# Altium PCB Copy of SoM.PcbDoc (part 1 of 8)
Units mm, origin at the board's own origin, x right, y up, seen from the top; angles counter-clockwise.
Board outline 69.6 x 50 mm, 10 copper layers ([1] Signal HS-H, [2] GND, [3] Signal HS-V, [4] Signal H, [5] GND, [6] POWER, [7] Signal V, [8] Signal HS-H, [9] GND, [10] Signal HS-V), stack 1.146 mm thick; 537 components, 516 nets, 5689 pads, 981 vias.
Unrouted connection lines stored in the file: 963.
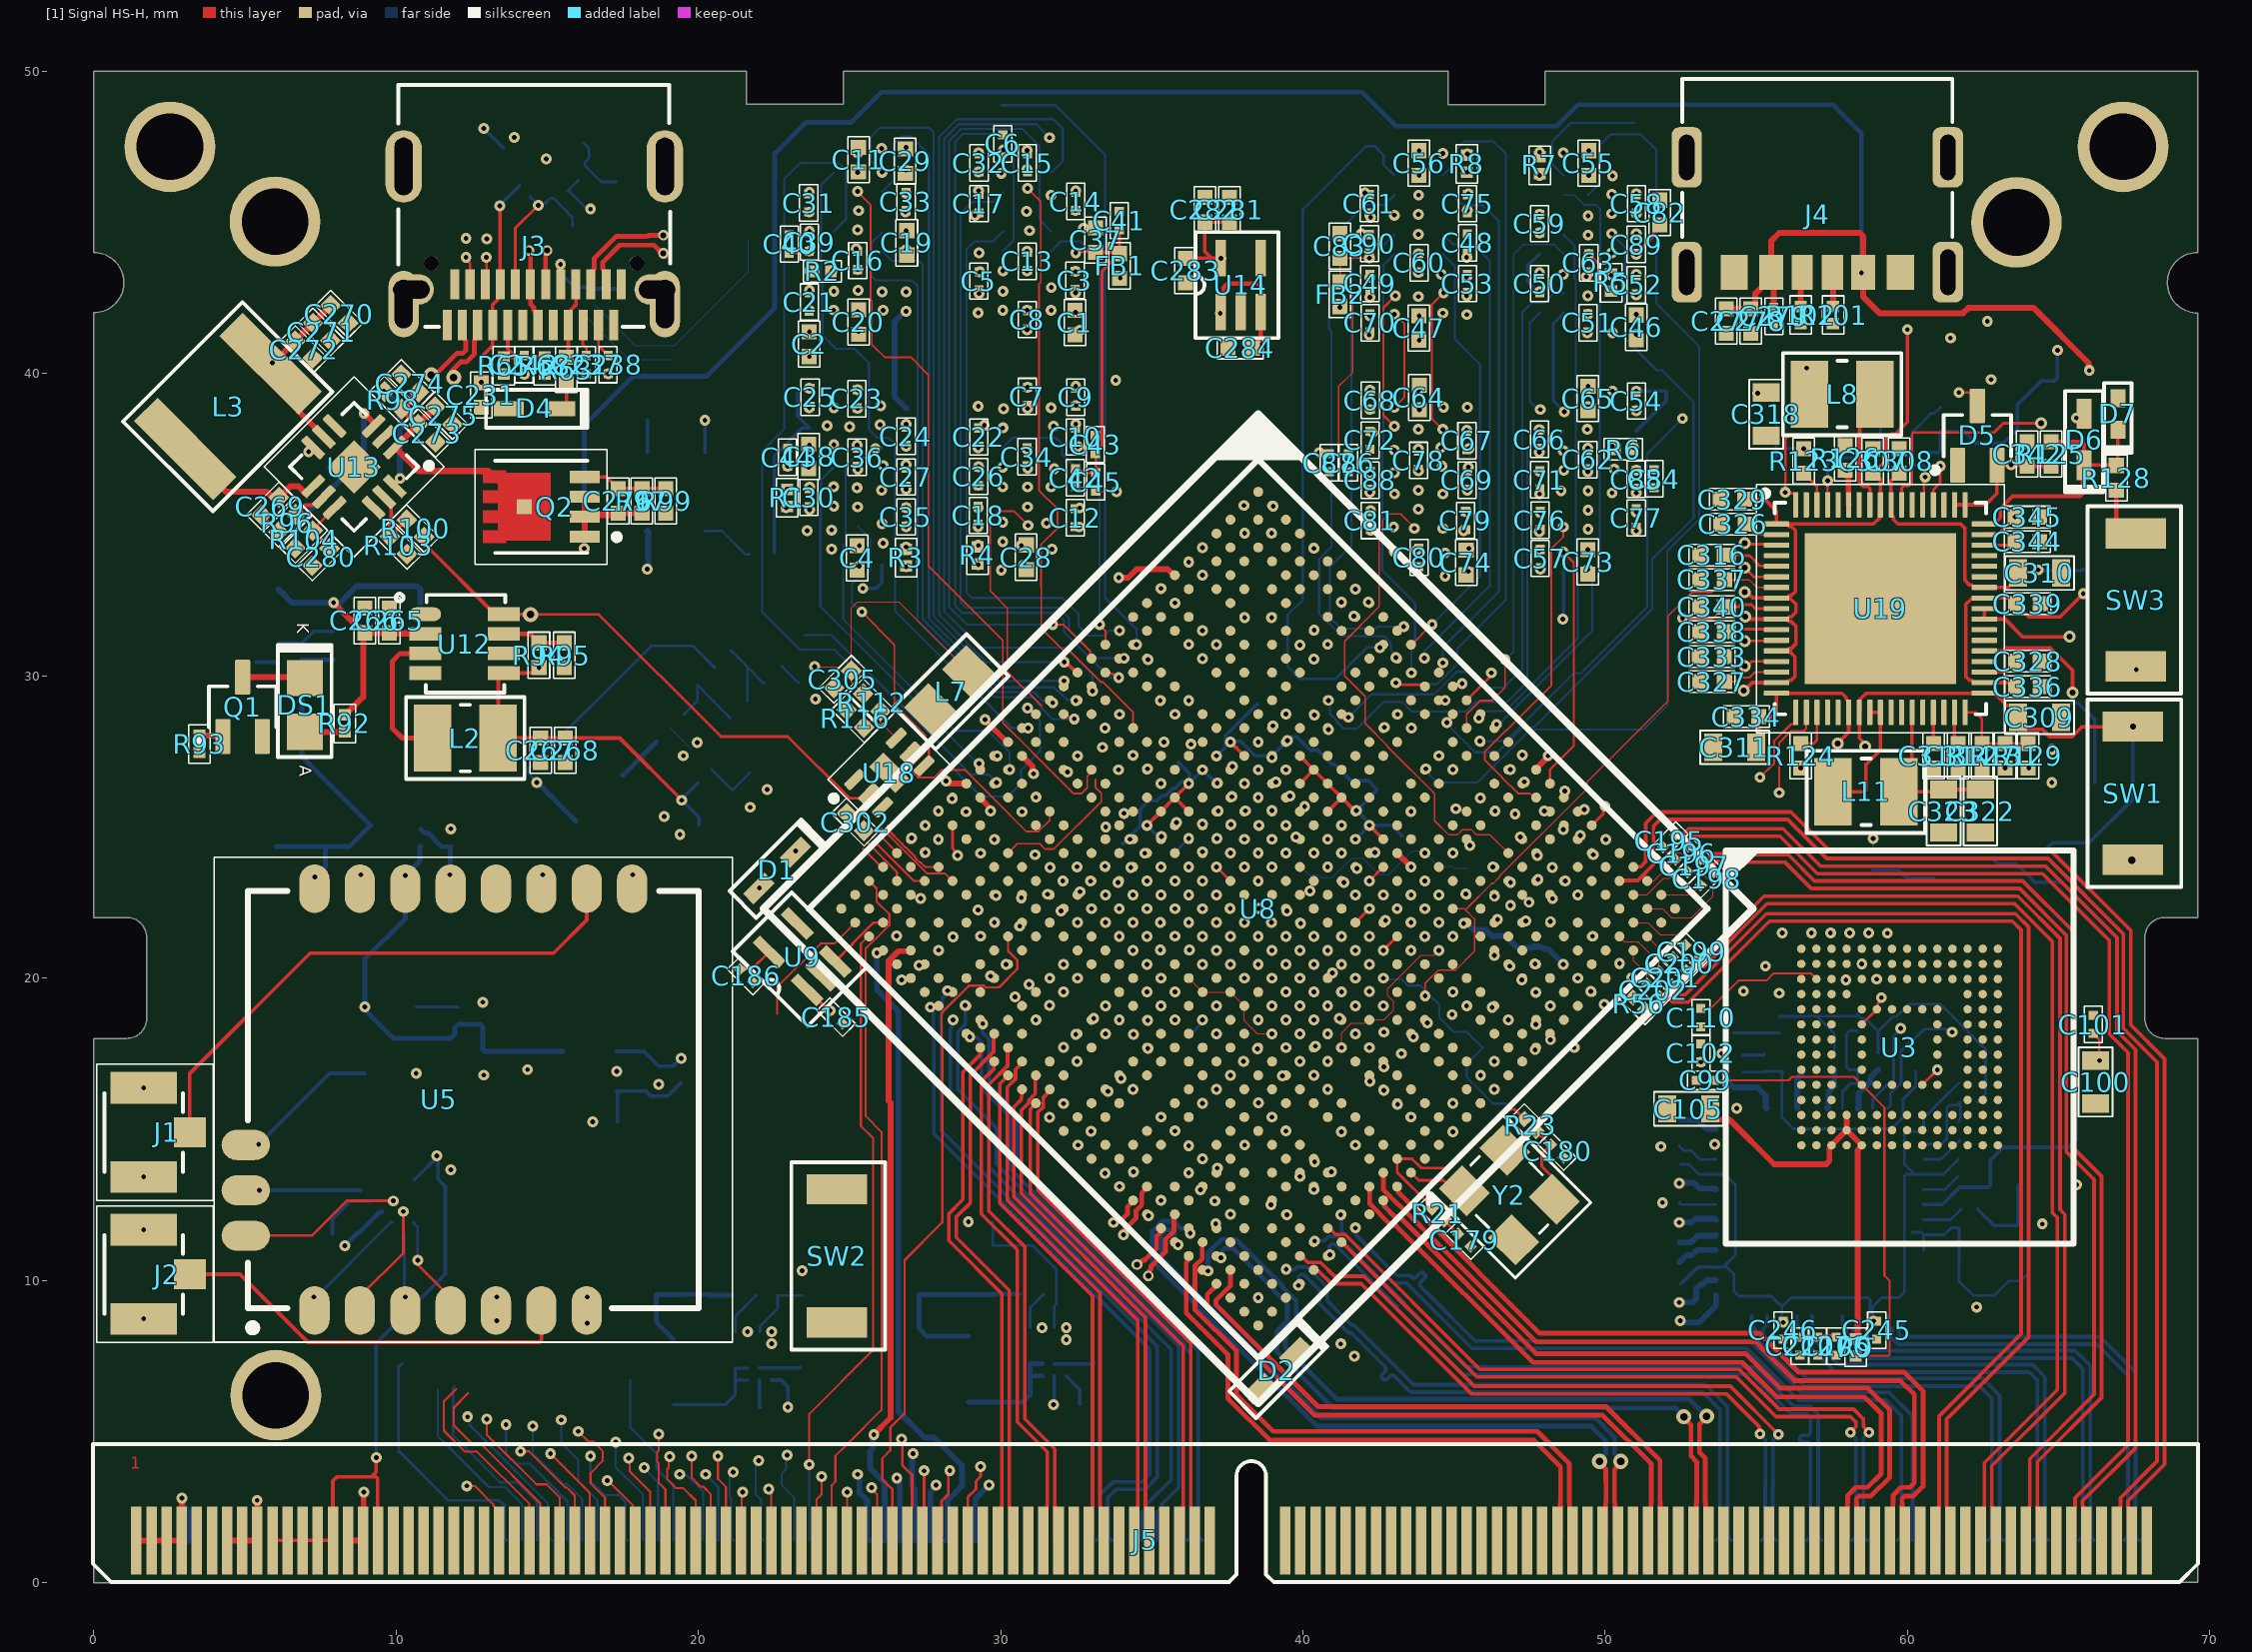
[diagram p0: [1] Signal HS-H view]
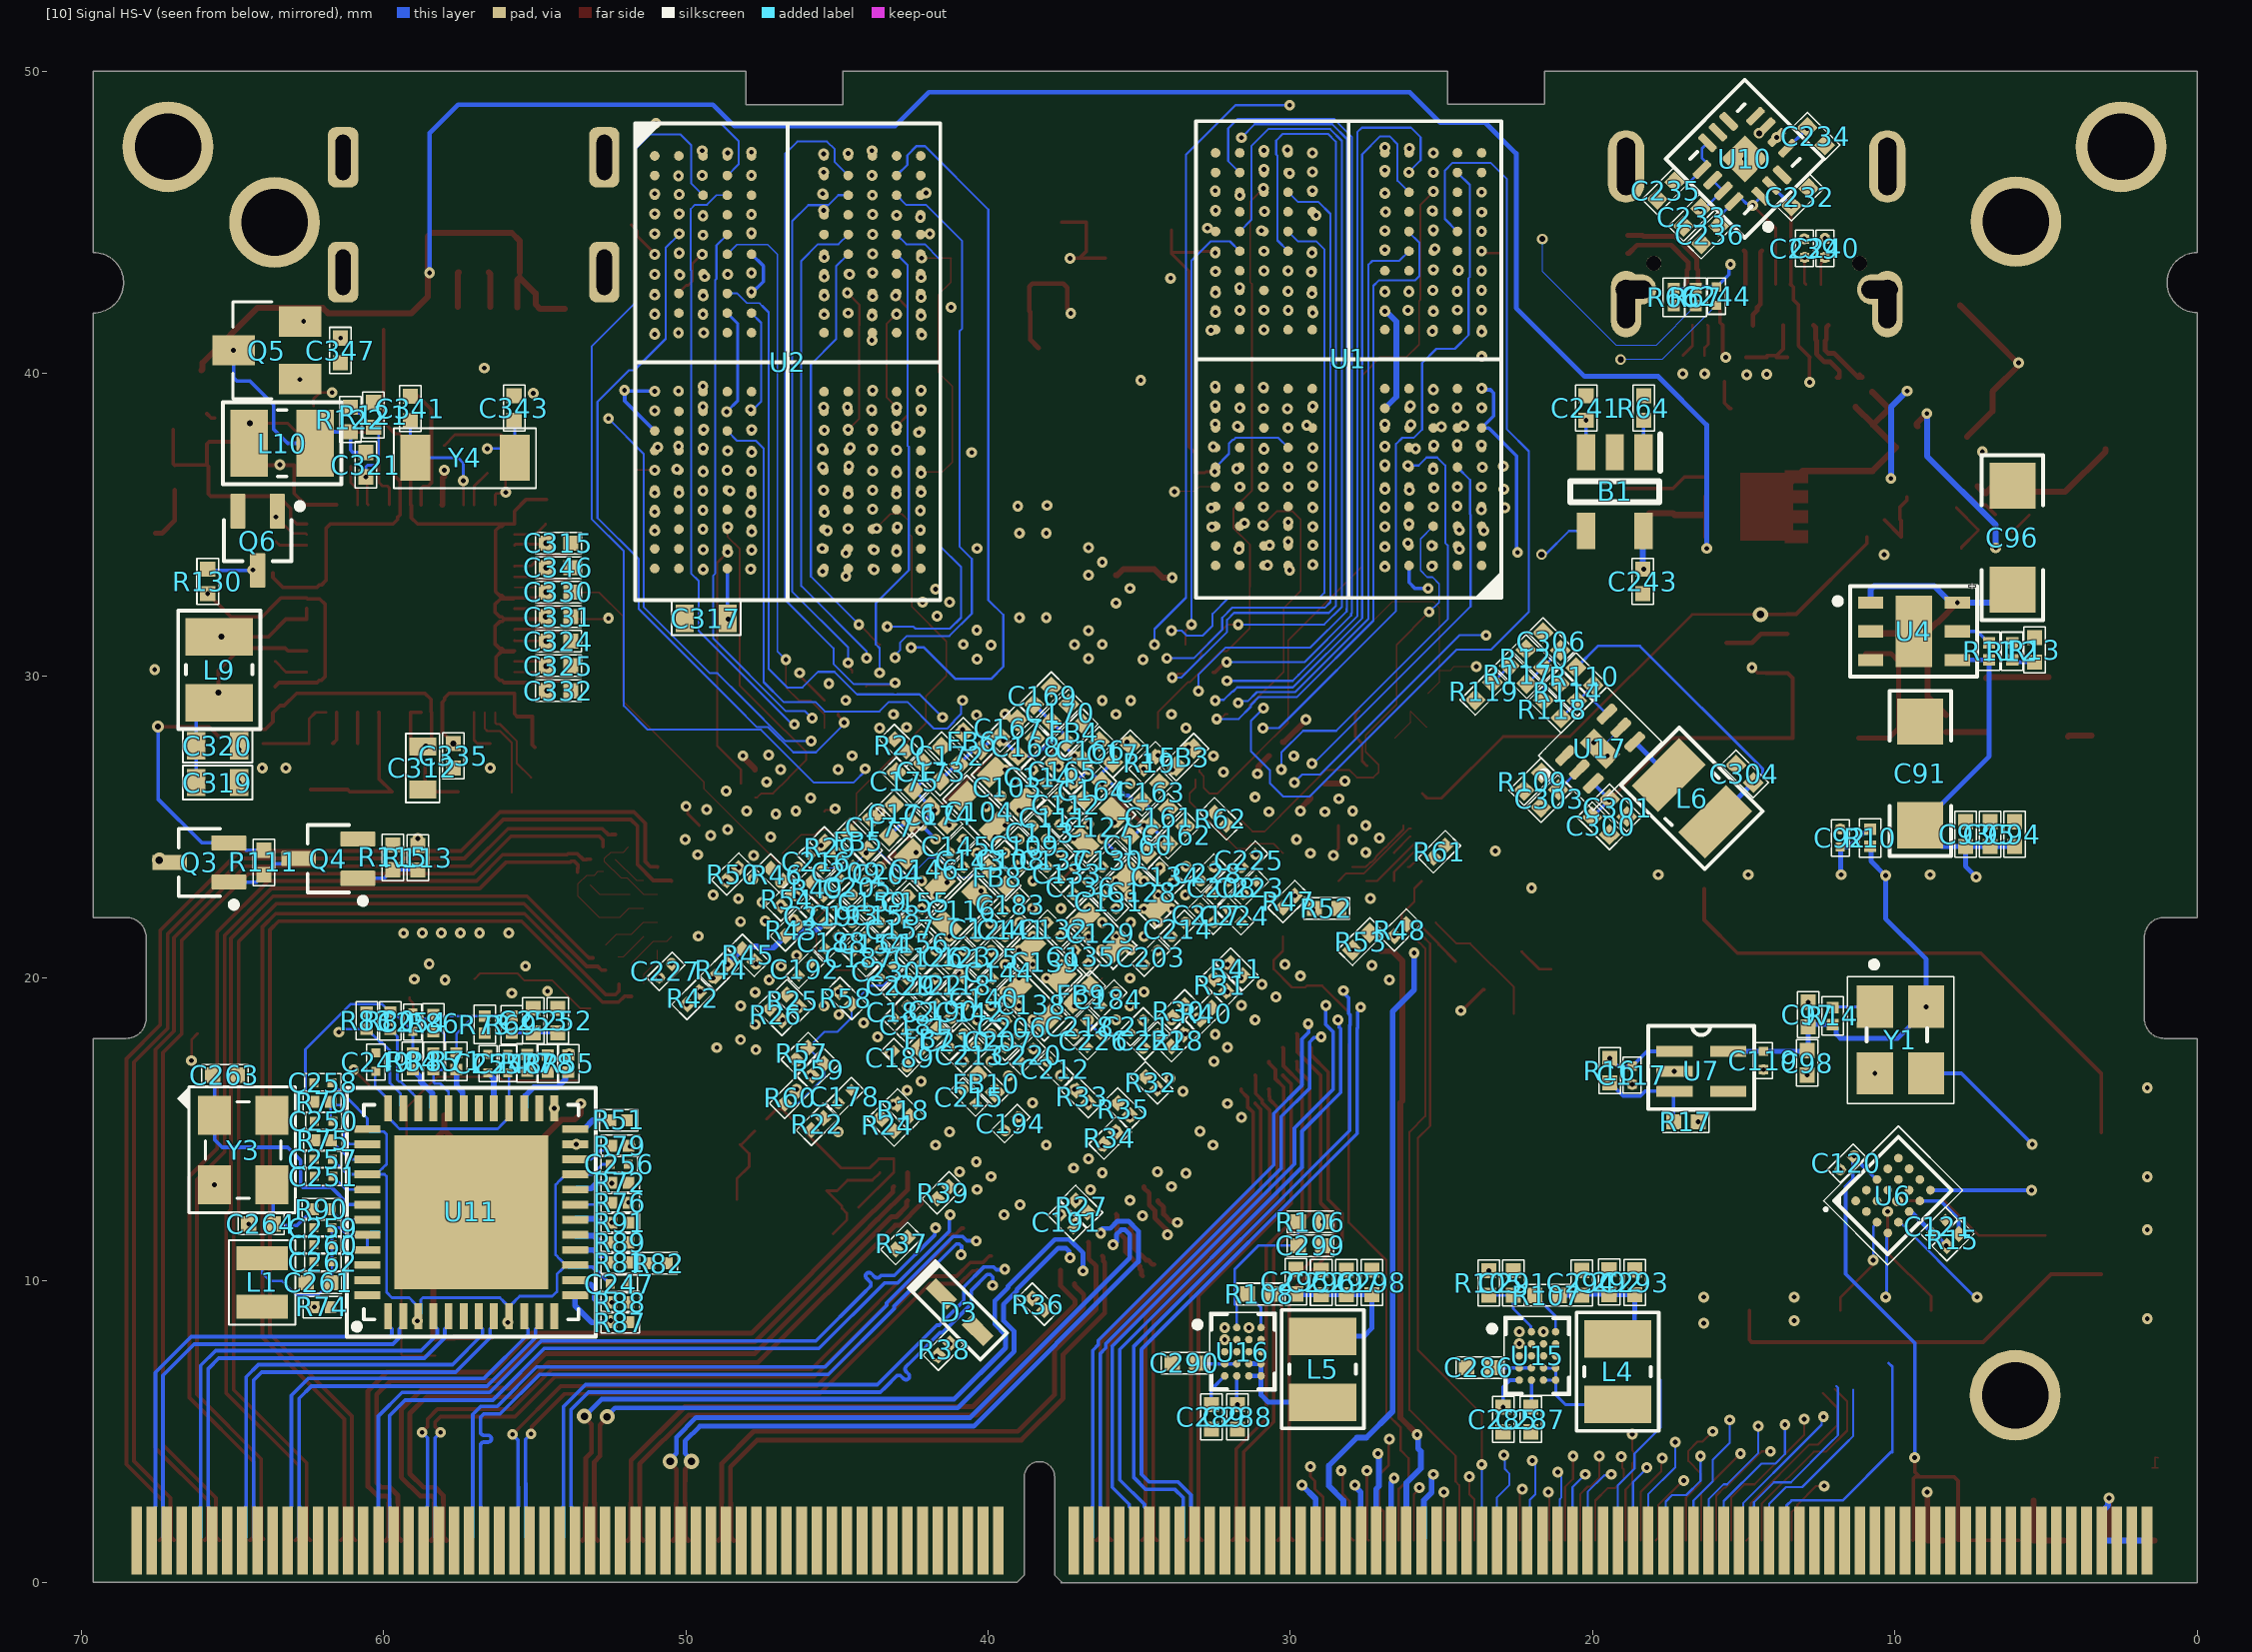
[diagram p1: [10] Signal HS-V view, seen from below]
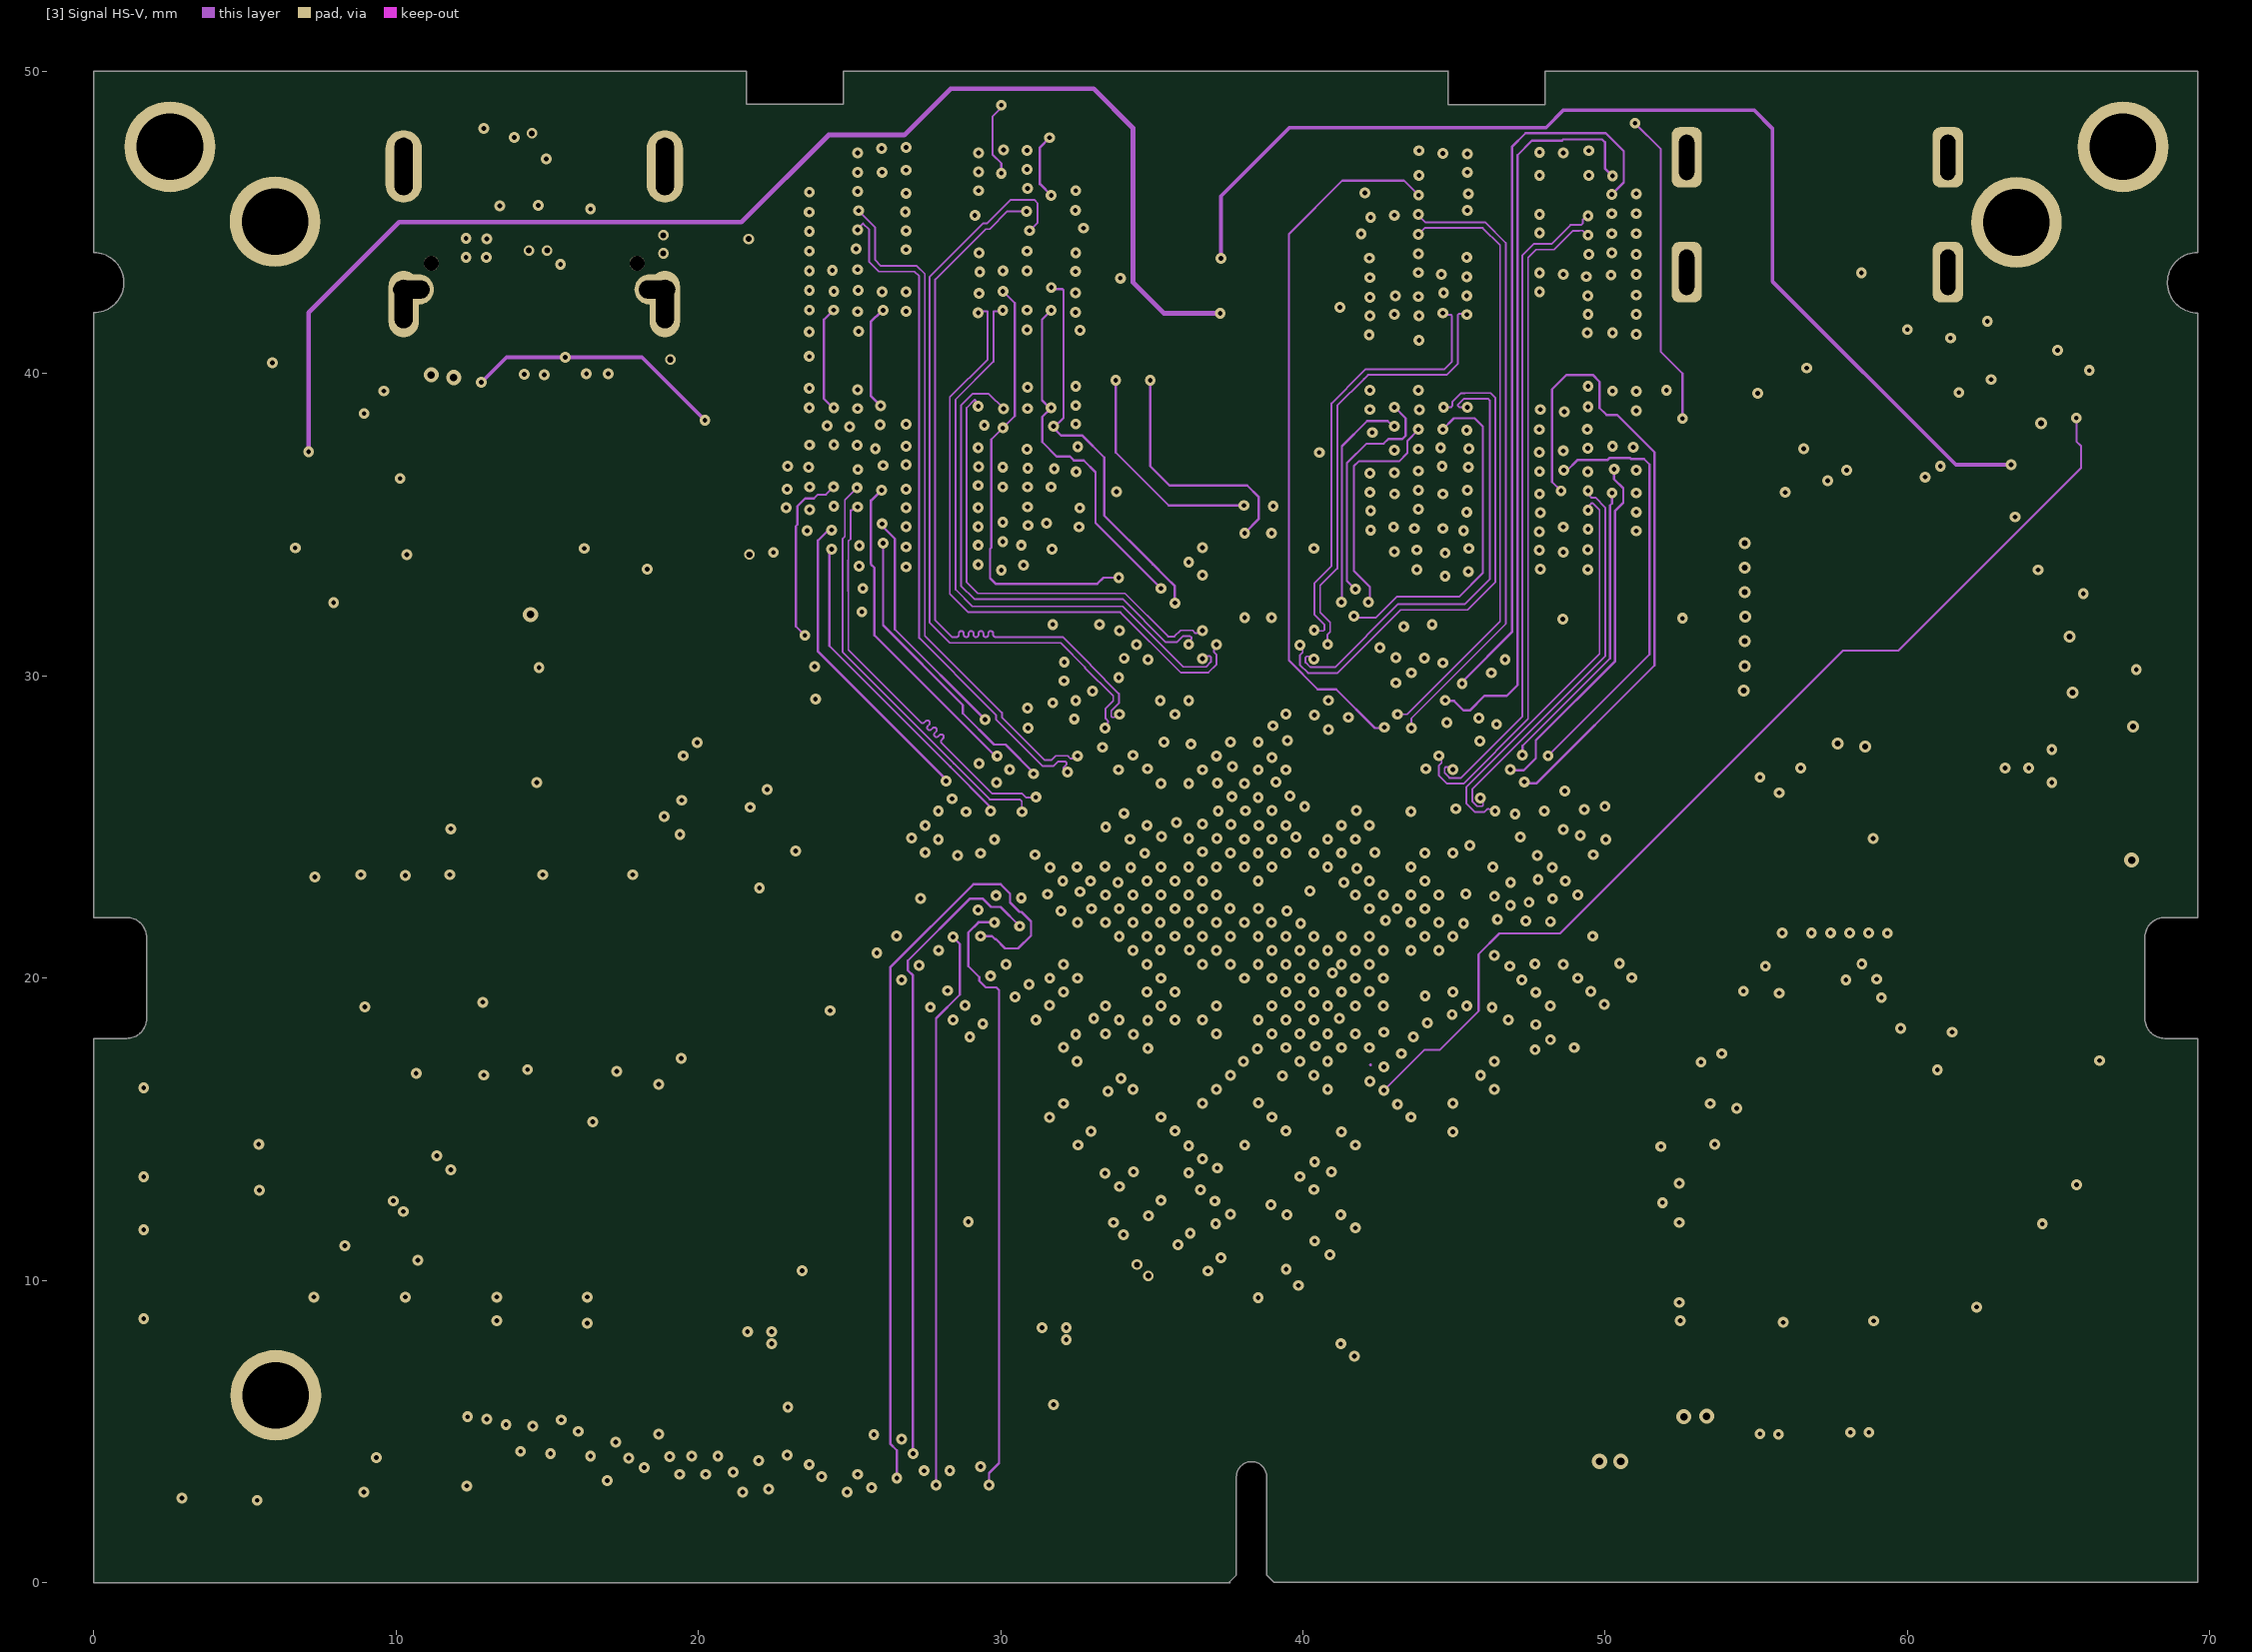
[diagram p2: [3] Signal HS-V]
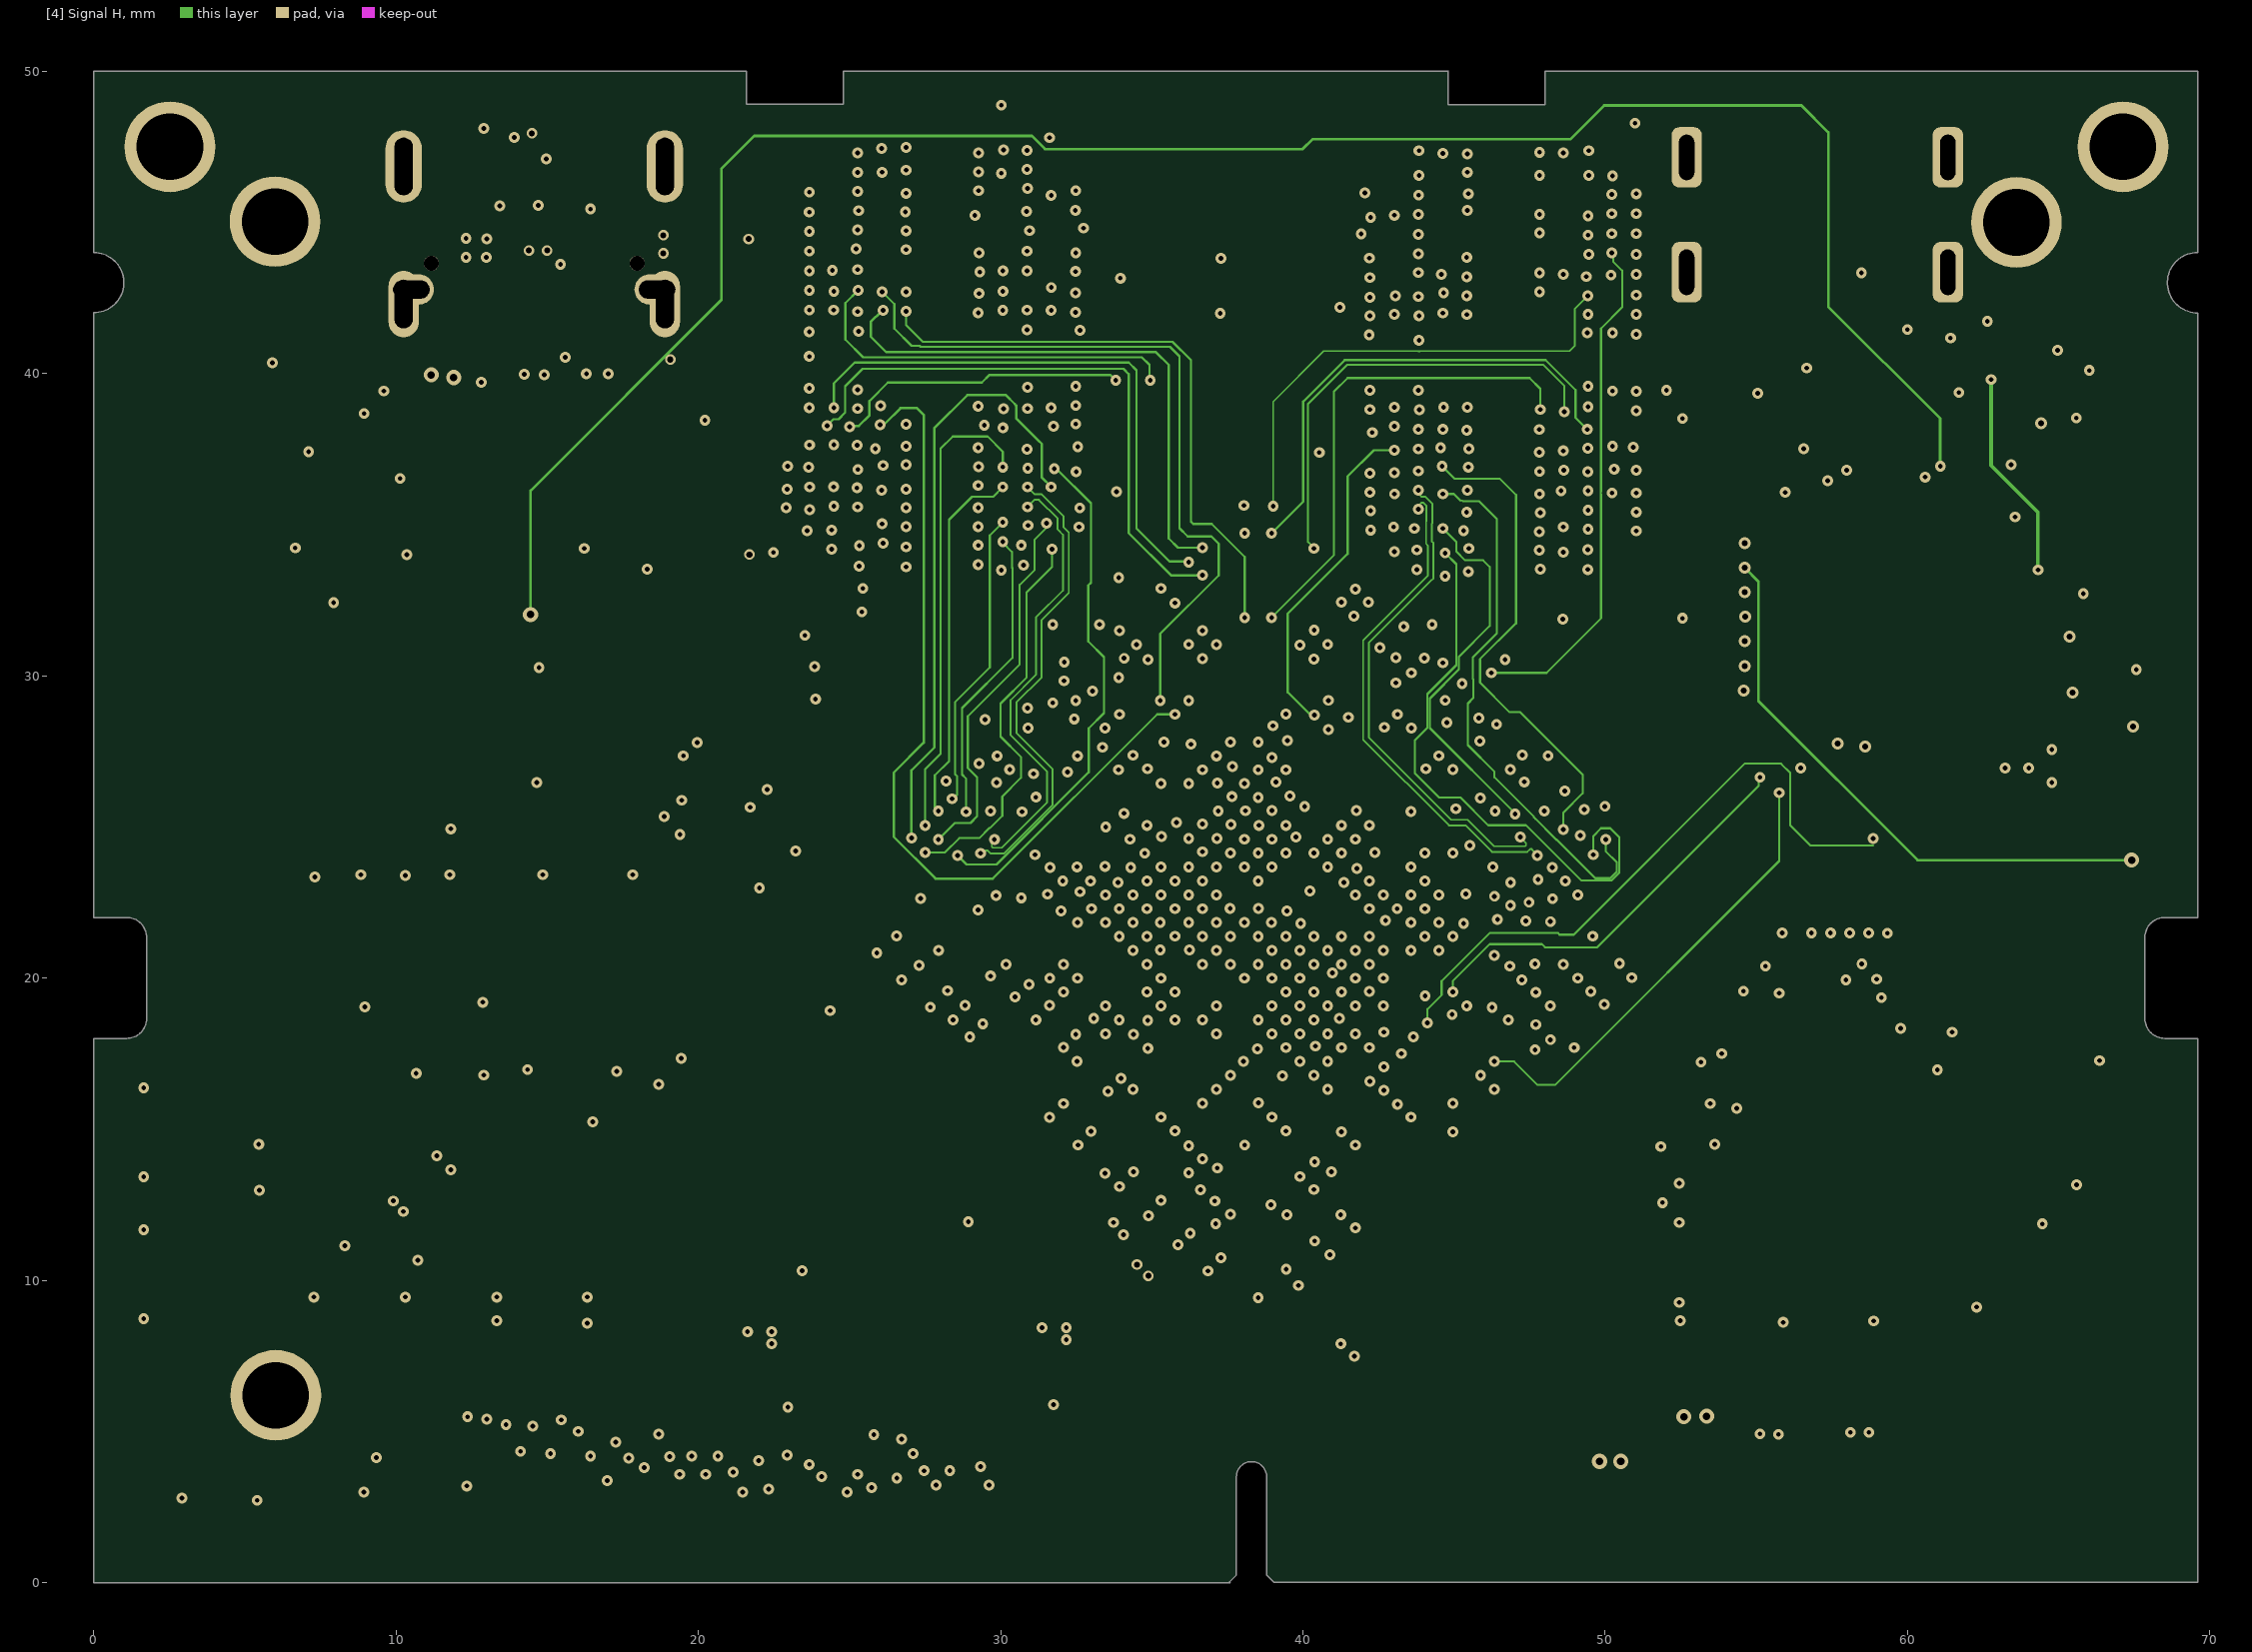
[diagram p3: [4] Signal H]
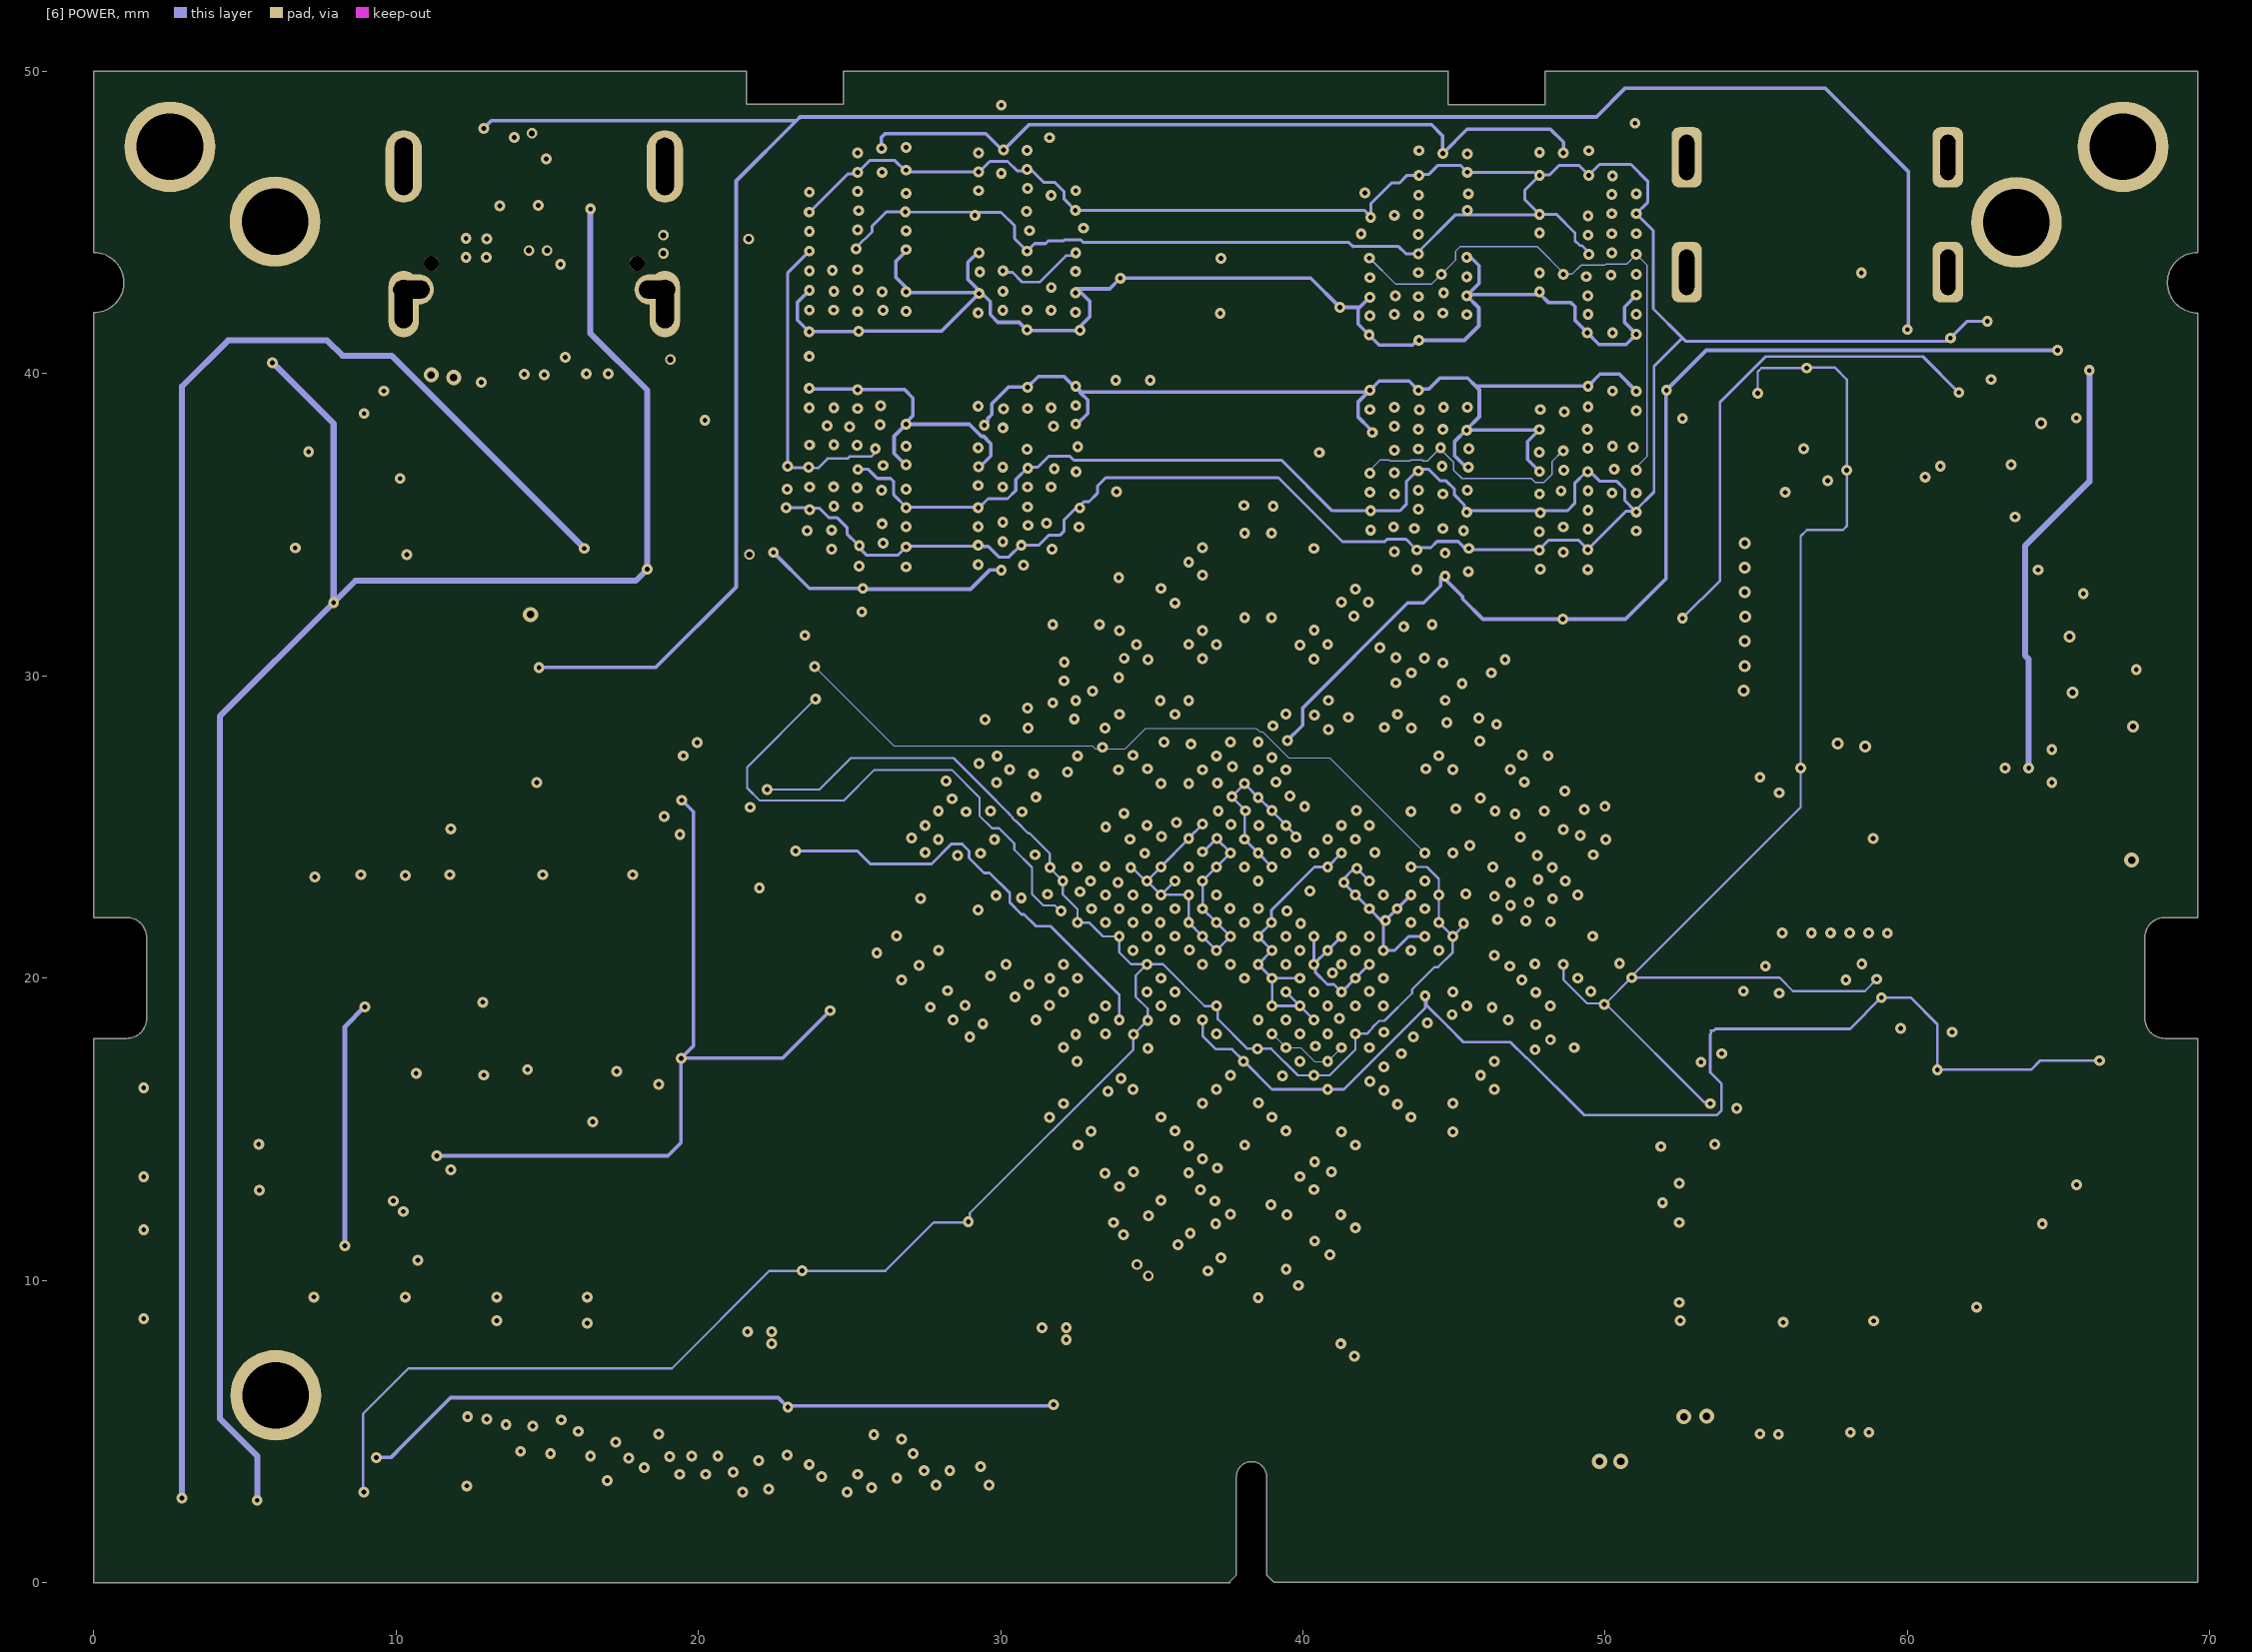
[diagram p4: [6] POWER]
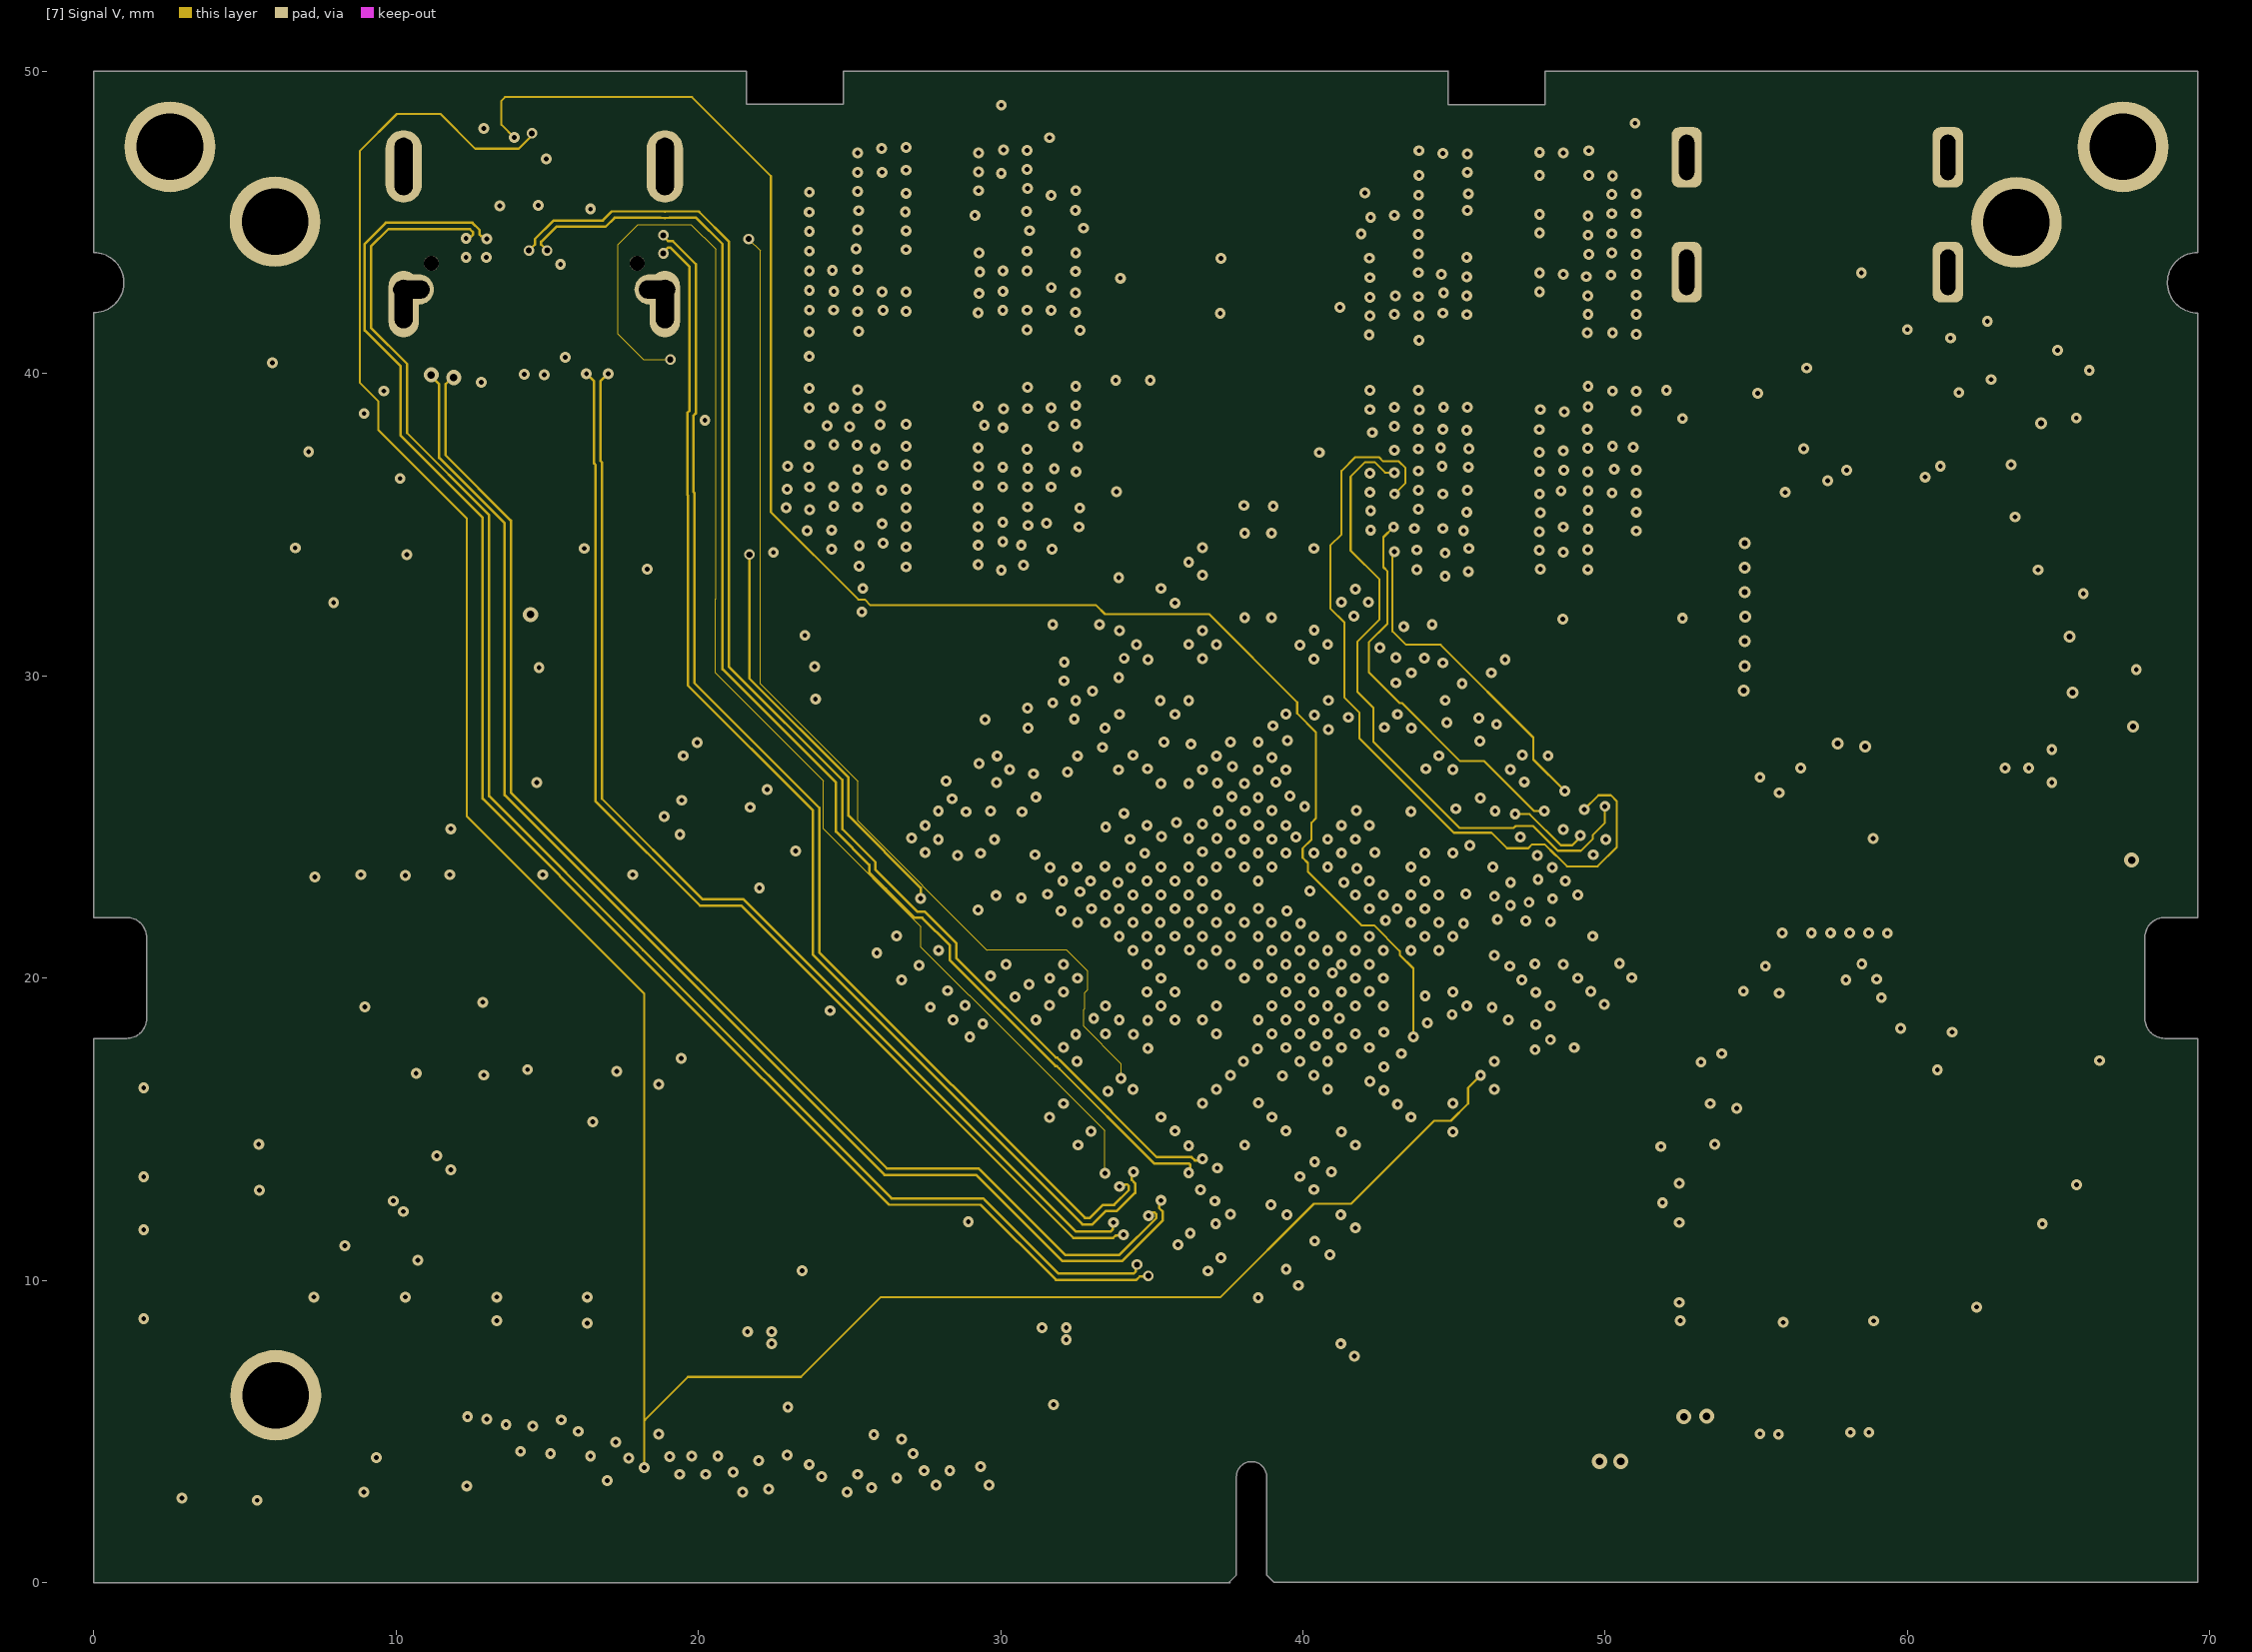
[diagram p5: [7] Signal V]
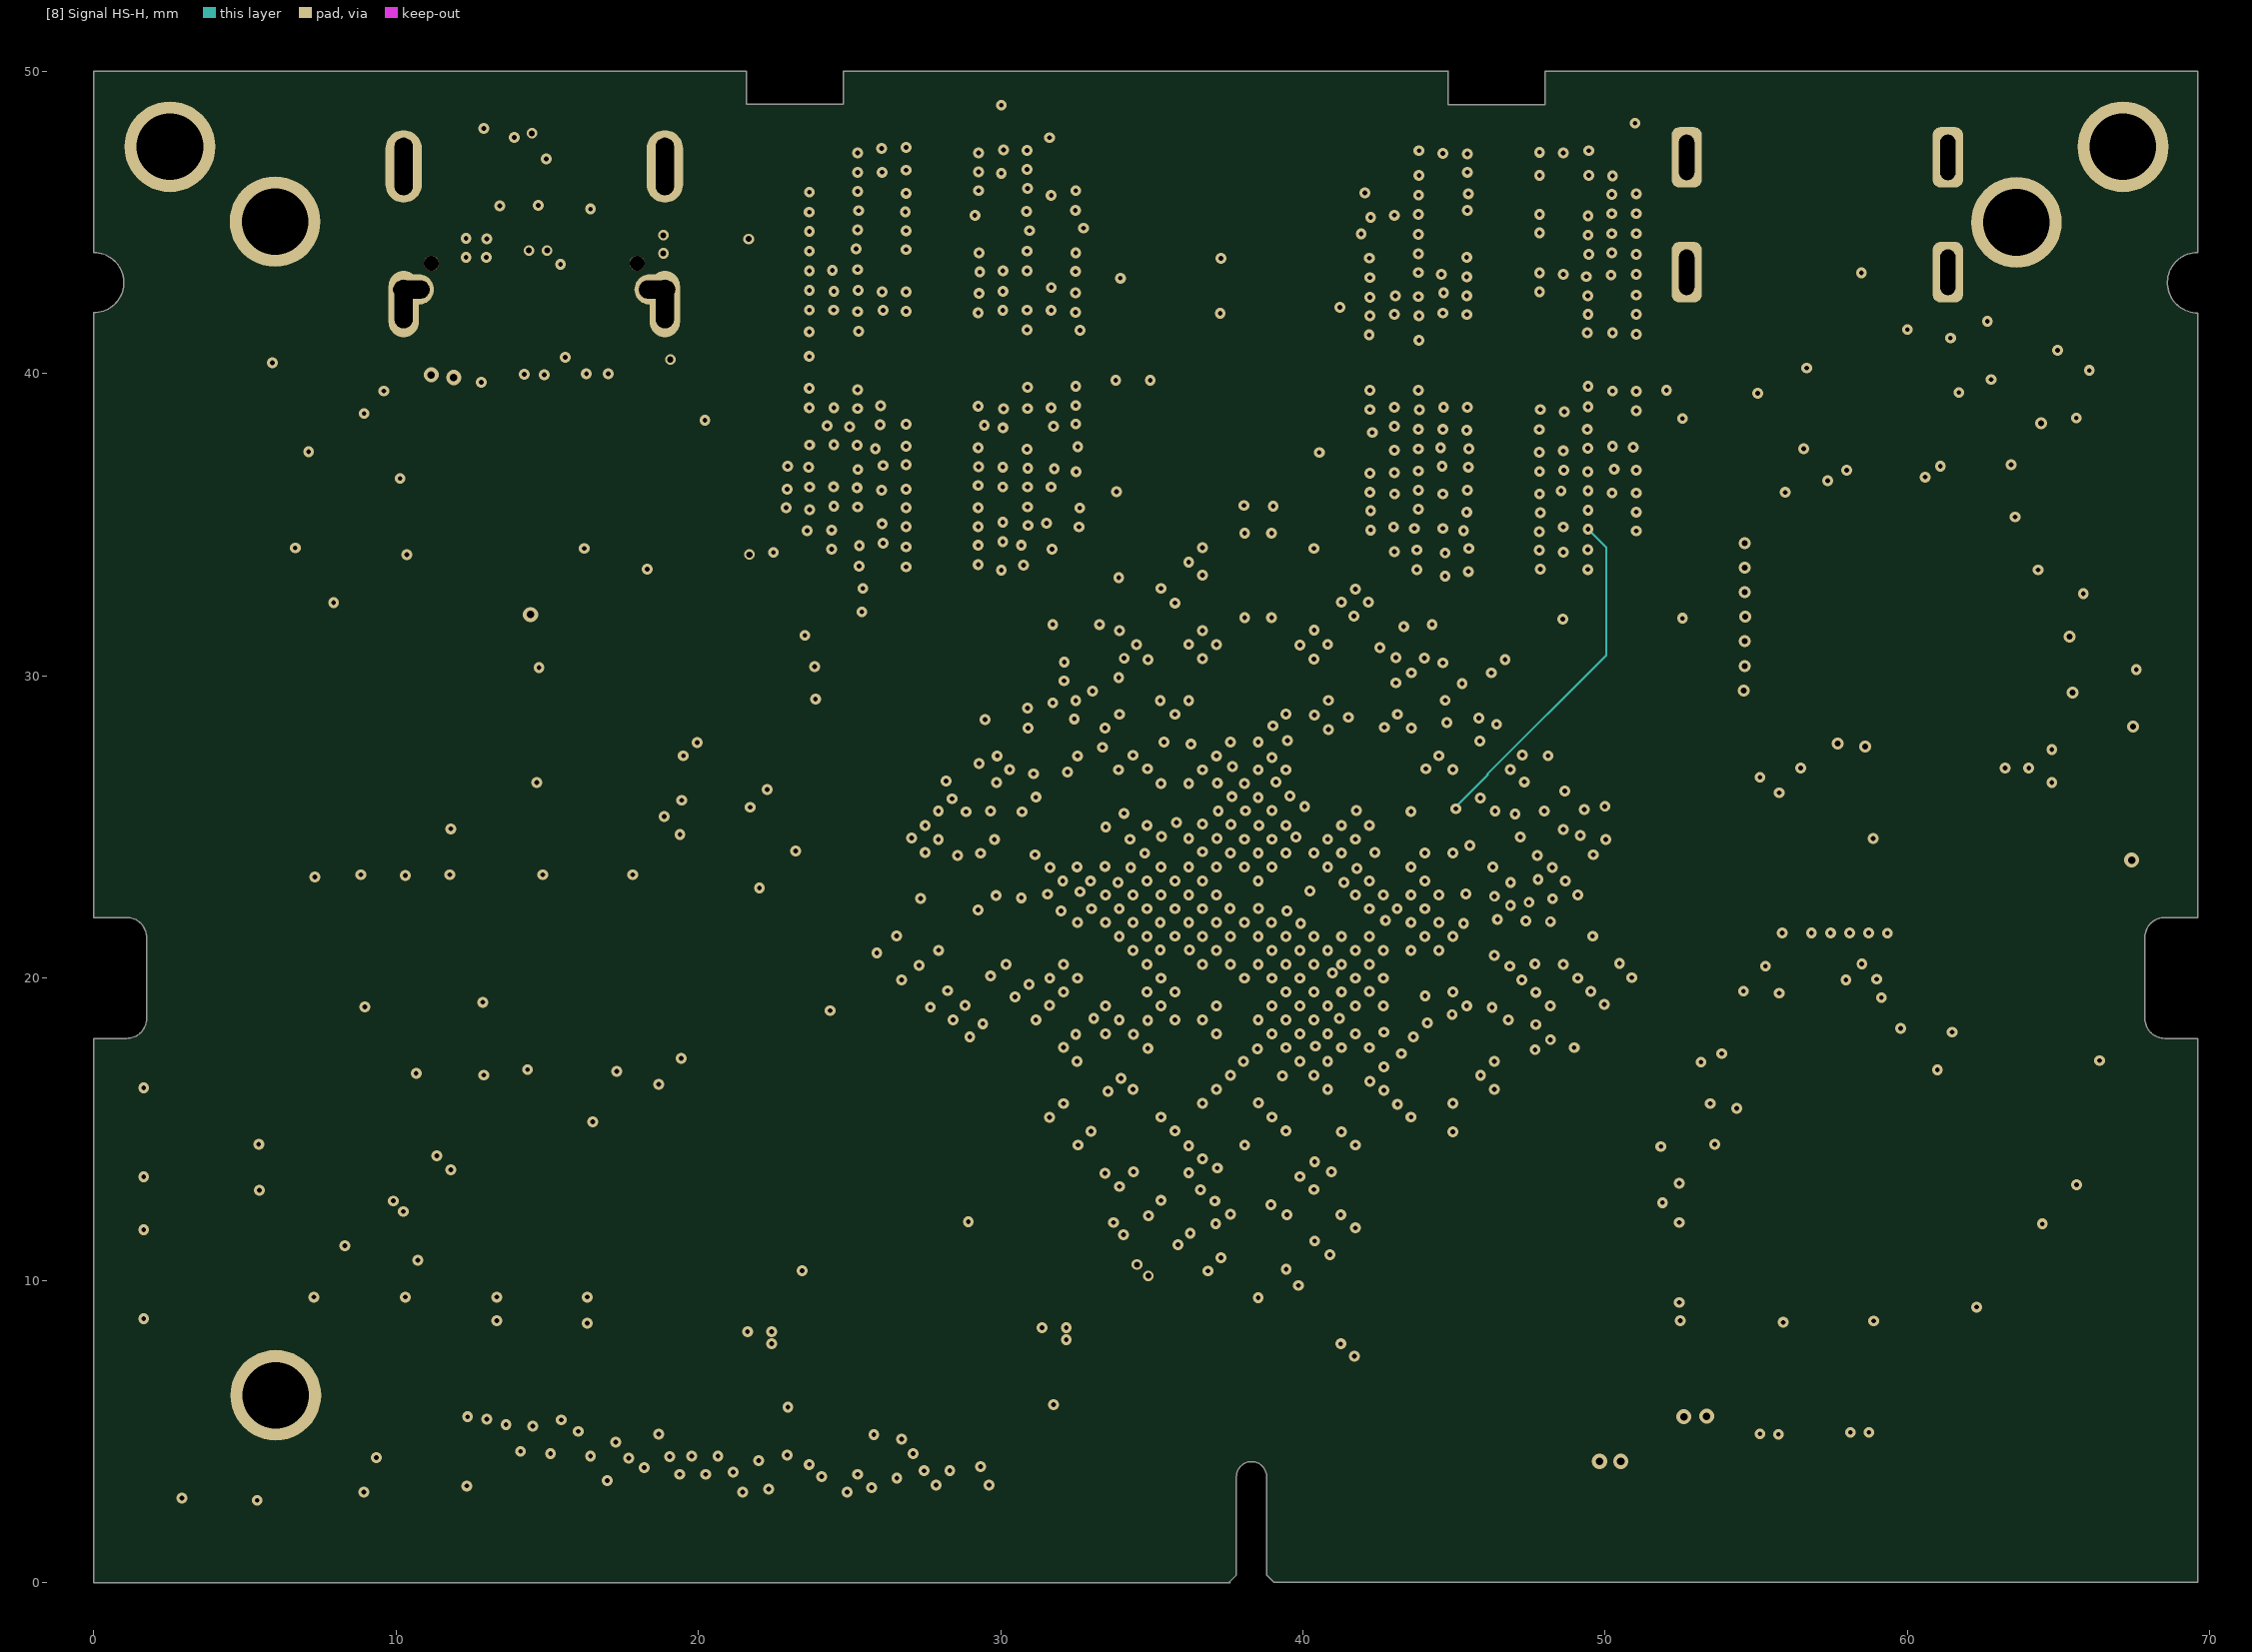
[diagram p6: [8] Signal HS-H]

## Layer stack, top to bottom
Top Solder: solder mask 0.01, Solder Resist, Dk 3.5
[1] Signal HS-H: signal copper 0.035
Dielectric 10: prepreg 0.116, PP-016, Dk 4.4
[2] GND: signal copper 0.015
Dielectric 2: core 0.1, Core-009, Dk 4.5
[3] Signal HS-V: signal copper 0.015
Dielectric 4: prepreg 0.108, PP-016, Dk 4.4
[4] Signal H: signal copper 0.015
Dielectric 5: core 0.1, Core-009, Dk 4.5
[5] GND: signal copper 0.015
Dielectric 1: prepreg 0.108, PP-016, Dk 4.4
[6] POWER: signal copper 0.015
Dielectric 9: core 0.1, Core-009, Dk 4.5
[7] Signal V: signal copper 0.015
Dielectric 8: prepreg 0.108, PP-016, Dk 4.4
[8] Signal HS-H: signal copper 0.015
Dielectric 3: core 0.1, Core-009, Dk 4.5
[9] GND: signal copper 0.015
Dielectric 11: prepreg 0.116, PP-016, Dk 4.4
[10] Signal HS-V: signal copper 0.035
Bottom Solder: solder mask 0.01, Solder Resist, Dk 3.5

## Board outline
0.001,0 0.001,18.004 1.101,18.004 ccw(c1.101,18.654) 1.751,18.654 1.751,21.354 ccw(c1.101,21.354) 1.101,22.004 0.001,22.004 0.001,42.016 ccw(c0.008,43.008) 0.008,44 0.001,44 0.001,49.984 0.021,50.004 21.596,50.004 21.596,48.902 24.799,48.902 24.799,50.004 44.799,50.004 44.801,50.002 44.801,48.894 48.004,48.894 48.004,50.004 69.601,50.004 69.601,44.002 69.589,44.002 ccw(c69.589,43.004) 69.601,42.006 69.601,22.004 68.501,22.004 ccw(c68.501,21.354) 67.851,21.354 67.851,18.654 ccw(c68.501,18.654) 68.501,18.004 69.601,18.004 69.601,0.004 39.051,0.004 38.801,0.254 38.801,3.504 ccw(c38.301,3.504) 38.301,4.004 ccw(c38.301,3.504) 37.801,3.504 37.801,0.254 37.551,0.004 37.592,0

## Design rules (kind name [scope] priority, off if disabled: settings)
BoardOutlineClearance [All] p1: gap=0.5 ignorepadtopadclearanceinfootprint=FALSE
Clearance Clearance_RK3399 [WithinRoom('RoomDefinition_RK3399')] p1: gap=0.254 ignorepadtopadclearanceinfootprint=FALSE except(0.01: Arc-Arc Arc-Track Arc-SMDPad Arc-THPad Arc-Via Track-Track Track-SMDPad Track-THPad Track-Via SMDPad-SMDPad SMDPad-THPad SMDPad-Via; 0.1: SMDPad-Fill SMDPad-Poly SMDPad-Region THPad-THPad THPad-Via THPad-Fill THPad-Poly THPad-Region Via-Via Via-Fill Via-Poly Via-Region; 0.203: Arc-Fill Arc-Poly Arc-Region Track-Fill Track-Poly Track-Region Fill-Fill Fill-Poly Fill-Region Poly-Poly Poly-Region Region-Region; 0.35: THPad-Text THPad-Hole)
Clearance Clearance_SDRAM [WithinRoom('RoomDefinition_SDRAM')] p2: gap=0.254 ignorepadtopadclearanceinfootprint=FALSE except(0.01: Arc-Arc Arc-Track Arc-SMDPad Arc-THPad Arc-Via Track-Track Track-SMDPad Track-THPad Track-Via SMDPad-SMDPad SMDPad-THPad SMDPad-Via; 0.1: SMDPad-Fill SMDPad-Poly SMDPad-Region THPad-THPad THPad-Via THPad-Fill THPad-Poly THPad-Region Via-Via Via-Fill Via-Poly Via-Region; 0.203: Arc-Fill Arc-Poly Arc-Region Track-Fill Track-Poly Track-Region Fill-Fill Fill-Poly Fill-Region Poly-Poly Poly-Region Region-Region; 0.35: THPad-Text THPad-Hole)
Clearance Clearance_SDRAM2 [WithinRoom('RoomDefinition_SDRAM')] p3: gap=0.254 ignorepadtopadclearanceinfootprint=FALSE except(0.01: Arc-Arc Arc-Track Arc-SMDPad Arc-THPad Arc-Via Track-Track Track-SMDPad Track-THPad Track-Via SMDPad-SMDPad SMDPad-THPad SMDPad-Via; 0.1: SMDPad-Fill SMDPad-Poly SMDPad-Region THPad-THPad THPad-Via THPad-Fill THPad-Poly THPad-Region Via-Via Via-Fill Via-Poly Via-Region; 0.203: Arc-Fill Arc-Poly Arc-Region Track-Fill Track-Poly Track-Region Fill-Fill Fill-Poly Fill-Region Poly-Poly Poly-Region Region-Region; 0.35: THPad-Text THPad-Hole)
Clearance Clearance_eMMC [WithinRoom('RoomDefinition_eMMC')] p4: gap=0.254 ignorepadtopadclearanceinfootprint=FALSE except(0.01: Arc-Arc Arc-Track Arc-SMDPad Arc-THPad Arc-Via Track-Track Track-SMDPad Track-THPad Track-Via SMDPad-SMDPad SMDPad-THPad SMDPad-Via; 0.1: SMDPad-Fill SMDPad-Poly SMDPad-Region THPad-THPad THPad-Via THPad-Fill THPad-Poly THPad-Region Via-Via Via-Fill Via-Poly Via-Region; 0.203: Arc-Fill Arc-Poly Arc-Region Track-Fill Track-Poly Track-Region Fill-Fill Fill-Poly Fill-Region Poly-Poly Poly-Region Region-Region; 0.35: THPad-Text THPad-Hole)
Clearance Clearance_connector [WithinRoom('RoomDefinition_connector')] p5: gap=0.254 ignorepadtopadclearanceinfootprint=FALSE except(0.09: Arc-Arc Arc-Track Track-Track; 0.103: Arc-SMDPad Track-SMDPad SMDPad-SMDPad; 0.127: Arc-Via Track-Via SMDPad-Via; 0.15: SMDPad-Fill SMDPad-Poly SMDPad-Region; 0.203: Arc-Fill Arc-Poly Arc-Region Arc-Hole Track-Fill Track-Poly Track-Region Track-Hole Via-Via Via-Fill Via-Poly Via-Region Fill-Fill Fill-Poly Fill-Region Poly-Poly Poly-Region Region-Region; 0.35: SMDPad-THPad THPad-THPad THPad-Via THPad-Text THPad-Hole)
Clearance [All] p6: gap=0.254 ignorepadtopadclearanceinfootprint=FALSE except(0.09: Arc-Arc Arc-Track Track-Track; 0.127: Arc-SMDPad Arc-Via Track-SMDPad Track-Via SMDPad-Via; 0.152: SMDPad-SMDPad; 0.203: Arc-Fill Arc-Poly Arc-Region Track-Fill Track-Poly Track-Region Via-Fill Via-Poly Via-Region Fill-Fill Fill-Poly Fill-Region Poly-Poly Poly-Region Region-Region; 0.25: Via-Via; 0.3: SMDPad-Fill SMDPad-Poly SMDPad-Region THPad-Fill THPad-Poly THPad-Region; 0.35: SMDPad-THPad THPad-THPad THPad-Via THPad-Text THPad-Hole)
DiffPairsRouting 50_OHM_DIFF [InDifferentialPairClass('50_OHM_DIFF')] p1: maxlimit=0.127 minlimit=0.127 mostfreqgap=0.127 toplayer_minwidth=0.48 toplayer_maxwidth=0.482 toplayer_prefwidth=0.48 midlayer1_minwidth=0.247 midlayer1_maxwidth=0.247 midlayer1_prefwidth=0.247 midlayer2_minwidth=0.247 midlayer2_maxwidth=0.247 midlayer2_prefwidth=0.247 midlayer3_minwidth=0.247 midlayer3_maxwidth=0.247 midlayer3_prefwidth=0.247 midlayer4_minwidth=0.247 midlayer4_maxwidth=0.247 midlayer4_prefwidth=0.247 midlayer5_minwidth=0.247 midlayer5_maxwidth=0.247 midlayer5_prefwidth=0.247 midlayer6_minwidth=0.247 midlayer6_maxwidth=0.247 midlayer6_prefwidth=0.247 midlayer7_minwidth=0.255 midlayer7_maxwidth=0.255 midlayer7_prefwidth=0.255 midlayer8_minwidth=0.255 midlayer8_maxwidth=0.255 midlayer8_prefwidth=0.255 bottomlayer_minwidth=0.48 bottomlayer_maxwidth=0.482 bottomlayer_prefwidth=0.48 impedanceprofiledriven=TRUE impedanceprofileid={BB9A9FD6-FBA0-40D4-BAB7-1F6DC983B902} impedanceprofilevalue=50.000000 maxuncoupledlength=12.7
DiffPairsRouting 90_OHM_DIFF [InDifferentialPairClass('90_OHM_DIFF')] p2: maxlimit=0.127 minlimit=0.127 mostfreqgap=0.127 toplayer_minwidth=0.159 toplayer_maxwidth=0.159 toplayer_prefwidth=0.159 midlayer1_minwidth=0.082 midlayer1_maxwidth=0.082 midlayer1_prefwidth=0.082 midlayer2_minwidth=0.082 midlayer2_maxwidth=0.082 midlayer2_prefwidth=0.082 midlayer3_minwidth=0.082 midlayer3_maxwidth=0.082 midlayer3_prefwidth=0.082 midlayer4_minwidth=0.082 midlayer4_maxwidth=0.082 midlayer4_prefwidth=0.082 midlayer5_minwidth=0.082 midlayer5_maxwidth=0.082 midlayer5_prefwidth=0.082 midlayer6_minwidth=0.082 midlayer6_maxwidth=0.082 midlayer6_prefwidth=0.082 midlayer7_minwidth=0.084 midlayer7_maxwidth=0.084 midlayer7_prefwidth=0.084 midlayer8_minwidth=0.084 midlayer8_maxwidth=0.084 midlayer8_prefwidth=0.084 bottomlayer_minwidth=0.159 bottomlayer_maxwidth=0.159 bottomlayer_prefwidth=0.159 impedanceprofiledriven=TRUE impedanceprofileid={4B4885C0-5904-4413-8F64-3BF1E413CD1C} impedanceprofilevalue=90.000000 maxuncoupledlength=12.7
DiffPairsRouting 100_OHM_DIFF [InDifferentialPairClass('100_OHM_DIFF')] p3: maxlimit=0.127 minlimit=0.127 mostfreqgap=0.127 toplayer_minwidth=0.122 toplayer_maxwidth=0.123 toplayer_prefwidth=0.122 midlayer1_minwidth=0.062 midlayer1_maxwidth=0.063 midlayer1_prefwidth=0.063 midlayer2_minwidth=0.062 midlayer2_maxwidth=0.062 midlayer2_prefwidth=0.062 midlayer3_minwidth=0.062 midlayer3_maxwidth=0.063 midlayer3_prefwidth=0.063 midlayer4_minwidth=0.062 midlayer4_maxwidth=0.063 midlayer4_prefwidth=0.063 midlayer5_minwidth=0.062 midlayer5_maxwidth=0.062 midlayer5_prefwidth=0.062 midlayer6_minwidth=0.062 midlayer6_maxwidth=0.063 midlayer6_prefwidth=0.063 midlayer7_minwidth=0.064 midlayer7_maxwidth=0.064 midlayer7_prefwidth=0.064 midlayer8_minwidth=0.064 midlayer8_maxwidth=0.064 midlayer8_prefwidth=0.064 bottomlayer_minwidth=0.122 bottomlayer_maxwidth=0.123 bottomlayer_prefwidth=0.122 impedanceprofiledriven=TRUE impedanceprofileid={ABE23CAD-D2EA-4A9E-BC24-D9FE88EE7734} impedanceprofilevalue=100.000000 maxuncoupledlength=12.7
HoleSize [All] p1: absolutevalues=TRUE maxlimit=5 minlimit=0.15 maxpercent=80.000 minpercent=20.000
MinimumSolderMaskSliver [All] p1: minsoldermaskwidth=0.1
PolygonConnect [All] p1: connectstyle=Relief reliefconductorwidth=0.35 reliefentries=4 polygonreliefangle="90 Angle" airgapwidth=0.35
RoomDefinition RoomDefinition_RK3399 [False] p1: confinementstyle=ConfineIn formatcopy=TRUE lockcomponents=FALSE outline 22.098,22.276 38.43,5.944 54.737,22.25 38.456,38.532 38.456,38.583 22.149,22.276
RoomDefinition RoomDefinition_connector [False] p2: confinementstyle=ConfineIn formatcopy=TRUE lockcomponents=FALSE outline -0.051,4.597 69.672,4.597 69.672,0.051 69.571,-0.051 69.52,0 -0.025,0 -0.025,4.623
RoutingVias [All] p1: holewidth=0.16 width=0.36 viastyle="Through Hole" minholewidth=0.15 minwidth=0.35 maxholewidth=0.25 maxwidth=0.5
SilkToSolderMaskClearance [IsPad] p1: minsilkscreentomaskgap=0.15 clearancetoexposedcopper=TRUE
SolderMaskExpansion [All] p1: expansion=0.076 istentingtop=FALSE
UnRoutedNet [All] p1: checkbadconnections=TRUE
Width 90_OHM [InNetClass('90_OHM')] p1: maxlimit=0.037 minlimit=0.007 preferedwidth=0.008 toplayer_minwidth=0.037 toplayer_prefwidth=0.037 midlayer1_minwidth=0.007 midlayer1_maxwidth=0.008 midlayer2_maxwidth=0.007 midlayer2_prefwidth=0.007 midlayer3_minwidth=0.007 midlayer3_maxwidth=0.008 midlayer4_minwidth=0.007 midlayer4_maxwidth=0.008 midlayer5_maxwidth=0.007 midlayer5_prefwidth=0.007 midlayer6_minwidth=0.007 midlayer6_maxwidth=0.008 midlayer7_minwidth=0.008 midlayer7_maxwidth=0.008 midlayer7_prefwidth=0.008 midlayer8_minwidth=0.008 midlayer8_maxwidth=0.008 midlayer8_prefwidth=0.008 bottomlayer_minwidth=0.037 bottomlayer_prefwidth=0.037 impedanceprofiledriven=TRUE impedanceprofileid={99509869-EB9B-4087-9EE9-D2642BF28C3D} impedanceprofilevalue=90.000000 minimp=50.000000 maximp=50.000000 favimp=50.000000
Width 100_OHM [InNetClass('100_OHM_DIFF')] p2: maxlimit=0.021 minlimit=0.002 preferedwidth=0.002 toplayer_minwidth=0.021 toplayer_prefwidth=0.021 midlayer1_minwidth=0.002 midlayer1_maxwidth=0.002 midlayer2_maxwidth=0.002 midlayer2_prefwidth=0.002 midlayer3_minwidth=0.002 midlayer3_maxwidth=0.002 midlayer4_minwidth=0.002 midlayer4_maxwidth=0.002 midlayer5_maxwidth=0.002 midlayer5_prefwidth=0.002 midlayer6_minwidth=0.002 midlayer6_maxwidth=0.002 midlayer7_minwidth=0.002 midlayer7_maxwidth=0.003 midlayer7_prefwidth=0.003 midlayer8_minwidth=0.002 midlayer8_maxwidth=0.003 midlayer8_prefwidth=0.003 bottomlayer_minwidth=0.021 bottomlayer_prefwidth=0.021 impedanceprofiledriven=TRUE impedanceprofileid={51A00FAE-751C-49C7-A0B1-FDF58364D494} impedanceprofilevalue=100.000000 minimp=50.000000 maximp=50.000000 favimp=50.000000
Width [InNetClass('50_OHM_IMP')] p3: maxlimit=0.192 minlimit=0.077 preferedwidth=0.077 toplayer_minwidth=0.191 toplayer_prefwidth=0.191 midlayer1_minwidth=0.077 midlayer1_maxwidth=0.077 midlayer2_maxwidth=0.077 midlayer2_prefwidth=0.077 midlayer3_minwidth=0.077 midlayer3_maxwidth=0.077 midlayer4_minwidth=0.077 midlayer4_maxwidth=0.077 midlayer5_maxwidth=0.077 midlayer5_prefwidth=0.077 midlayer6_minwidth=0.077 midlayer6_maxwidth=0.077 midlayer7_minwidth=0.08 midlayer7_maxwidth=0.08 midlayer7_prefwidth=0.08 midlayer8_minwidth=0.08 midlayer8_maxwidth=0.08 midlayer8_prefwidth=0.08 bottomlayer_minwidth=0.191 bottomlayer_prefwidth=0.191 impedanceprofiledriven=TRUE impedanceprofileid={FEDECD27-CFD0-4827-AB37-DC2B632F9CBF} impedanceprofilevalue=50.000000 minimp=50.000000 maximp=50.000000 favimp=50.000000
25 further rules are at their usual default settings.

## Classes and differential pairs
net class 100_OHM_DIFF: DDR0_CLK1_N DDR0_CLK1_P DDR0_CLK_N DDR0_CLK_P EDP_AVDD_0V9 EDP_TX0_N EDP_TX0_P EDP_TX1_N EDP_TX1_P EDP_TX2_N EDP_TX2_P EDP_TX3_N EDP_TX3_P EDPAUX_N EDPAUX_P GND NetC195_1 NetC196_1 NetC197_1 NetC198_1 NetC199_1 NetC200_1 NetC201_1 NetC202_1 NetR29_1
differential pair class 90_OHM_DIFF: HOST0_D HOST1_D TYPEC0_D TYPEC0_RX1 TYPEC0_RX2 TYPEC0_TX1 TYPEC0_TX2 TYPEC1_D TYPEC1_RX1 TYPEC1_RX2 TYPEC1_TX1 TYPEC1_TX2
differential pair class 100_OHM_DIFF: DDR0_CLK DDR0_CLK1 DDR0_DQS0 DDR0_DQS1 DDR0_DQS2 DDR0_DQS3 DDR1_CLK DDR1_CLK1 DDR1_DQS0 DDR1_DQS1 DDR1_DQS2 DDR1_DQS3 EDP_TX0 EDP_TX1 EDP_TX2 EDP_TX3 EDPAUX HDMI_TX0 HDMI_TX1 HDMI_TX2 HDMI_TXCLK MDI0 MDI1 MDI2 MDI3 MIPI_RX0_CLK MIPI_RX0_D0 MIPI_RX0_D1 MIPI_RX0_D2 MIPI_RX0_D3 MIPI_TX0_CLK MIPI_TX0_D0 MIPI_TX0_D1 MIPI_TX0_D2 MIPI_TX0_D3 MIPI_TX1/RX1_CLK MIPI_TX1/RX1_D0 MIPI_TX1/RX1_D1 MIPI_TX1/RX1_D2 MIPI_TX1/RX1_D3 PCIE_REF_CLK PCIE_RX0 PCIE_RX1 PCIE_RX2 PCIE_RX3 PCIE_TX0 PCIE_TX1 PCIE_TX2 PCIE_TX3
net class 90_OHM: GND NetR32_1 NetR33_1 NetR34_1 NetR35_1 TYPEC0_SBU1_DC_N TYPEC0_SBU1_DC_P TYPEC0_SBU1_N TYPEC0_SBU1_P TYPEC1_SBU1 TYPEC1_SBU1_DC TYPEC1_SBU2 TYPEC1_SBU2_DC
net class 50_OHM_IMP: DDR0_A0 DDR0_A1 DDR0_A2 DDR0_A4 DDR0_A5 DDR0_CKE0 DDR0_CKE1 DDR0_CS0N DDR0_CS1N DDR0_CS2N DDR0_CS3N EDP_AVDD_1V8 EMMC_CLKO EMMC_CMD EMMC_D0 EMMC_D1 EMMC_D2 EMMC_D3 EMMC_D4 EMMC_D5 EMMC_D6 EMMC_D7 EMMC_STRB MAC_COL MAC_CRS MAC_MCLK MAC_MDC MAC_MDIO MAC_RXCLK MAC_RXD0 MAC_RXD1 MAC_RXD2 MAC_RXD3 MAC_RXDV MAC_RXER MAC_TXCLK MAC_TXD0 MAC_TXD1 MAC_TXD2 MAC_TXD3 MAC_TXEN NetR24_1 NetR25_1 NetR46_1 NetR49_2 NetR50_1 NetR51_2 NetR54_1 NetR55_2 NetR56_1 SDIO0_CLK SDIO0_CMD SDIO0_D0 SDIO0_D1 SDIO0_D2 SDIO0_D3 SDIO0_DETN SDMMC0_CLK SDMMC0_CMD SDMMC0_D0 SDMMC0_D1 SDMMC0_D2 SDMMC0_D3
differential pair EDPAUX: +EDPAUX_P -EDPAUX_N
differential pair EDP_TX3: +EDP_TX3_P -EDP_TX3_N
differential pair EDP_TX2: +EDP_TX2_P -EDP_TX2_N
differential pair EDP_TX1: +EDP_TX1_P -EDP_TX1_N
differential pair EDP_TX0: +EDP_TX0_P -EDP_TX0_N
differential pair TYPEC1_TX2: +TYPEC1_TX2_P -TYPEC1_TX2_N
differential pair TYPEC1_TX1: +TYPEC1_TX1_P -TYPEC1_TX1_N
differential pair TYPEC1_RX2: +TYPEC1_RX2_P -TYPEC1_RX2_N
differential pair TYPEC1_RX1: +TYPEC1_RX1_P -TYPEC1_RX1_N
differential pair TYPEC1_D: +TYPEC1_D_P -TYPEC1_D_N
differential pair TYPEC0_TX2: +TYPEC0_TX2_P -TYPEC0_TX2_N
differential pair TYPEC0_TX1: +TYPEC0_TX1_P -TYPEC0_TX1_N
differential pair TYPEC0_RX2: +TYPEC0_RX2_P -TYPEC0_RX2_N
differential pair TYPEC0_RX1: +TYPEC0_RX1_P -TYPEC0_RX1_N
differential pair TYPEC0_D: +TYPEC0_D_P -TYPEC0_D_N
differential pair PCIE_TX3: +PCIE_TX3_P -PCIE_TX3_N
differential pair PCIE_TX2: +PCIE_TX2_P -PCIE_TX2_N
differential pair PCIE_TX1: +PCIE_TX1_P -PCIE_TX1_N
differential pair PCIE_TX0: +PCIE_TX0_P -PCIE_TX0_N
differential pair PCIE_RX3: +PCIE_RX3_P -PCIE_RX3_N
differential pair PCIE_RX2: +PCIE_RX2_P -PCIE_RX2_N
differential pair PCIE_RX1: +PCIE_RX1_P -PCIE_RX1_N
differential pair PCIE_RX0: +PCIE_RX0_P -PCIE_RX0_N
differential pair PCIE_REF_CLK: +PCIE_REF_CLK_P -PCIE_REF_CLK_N
differential pair MIPI_TX1/RX1_D3: +MIPI_TX1/RX1_D3_P -MIPI_TX1/RX1_D3_N
differential pair MIPI_TX1/RX1_D2: +MIPI_TX1/RX1_D2_P -MIPI_TX1/RX1_D2_N
differential pair MIPI_TX1/RX1_D1: +MIPI_TX1/RX1_D1_P -MIPI_TX1/RX1_D1_N
differential pair MIPI_TX1/RX1_D0: +MIPI_TX1/RX1_D0_P -MIPI_TX1/RX1_D0_N
differential pair MIPI_TX1/RX1_CLK: +MIPI_TX1/RX1_CLK_P -MIPI_TX1/RX1_CLK_N
differential pair MIPI_TX0_D3: +MIPI_TX0_D3_P -MIPI_TX0_D3_N
differential pair MIPI_TX0_D2: +MIPI_TX0_D2_P -MIPI_TX0_D2_N
differential pair MIPI_TX0_D1: +MIPI_TX0_D1_P -MIPI_TX0_D1_N
differential pair MIPI_TX0_D0: +MIPI_TX0_D0_P -MIPI_TX0_D0_N
differential pair MIPI_TX0_CLK: +MIPI_TX0_CLK_P -MIPI_TX0_CLK_N
differential pair MIPI_RX0_D3: +MIPI_RX0_D3_P -MIPI_RX0_D3_N
differential pair MIPI_RX0_D2: +MIPI_RX0_D2_P -MIPI_RX0_D2_N
differential pair MIPI_RX0_D1: +MIPI_RX0_D1_P -MIPI_RX0_D1_N
differential pair MIPI_RX0_D0: +MIPI_RX0_D0_P -MIPI_RX0_D0_N
differential pair MIPI_RX0_CLK: +MIPI_RX0_CLK_P -MIPI_RX0_CLK_N
differential pair MDI3: +MDI3_P -MDI3_N
differential pair MDI2: +MDI2_P -MDI2_N
differential pair MDI1: +MDI1_P -MDI1_N
differential pair MDI0: +MDI0_P -MDI0_N
differential pair HOST1_D: +HOST1_D_P -HOST1_D_N
differential pair HOST0_D: +HOST0_D_P -HOST0_D_N
differential pair HDMI_TXCLK: +HDMI_TXCLK_P -HDMI_TXCLK_N
differential pair HDMI_TX2: +HDMI_TX2_P -HDMI_TX2_N
differential pair HDMI_TX1: +HDMI_TX1_P -HDMI_TX1_N
differential pair HDMI_TX0: +HDMI_TX0_P -HDMI_TX0_N
differential pair DDR1_CLK: +DDR1_CLK_P -DDR1_CLK_N
differential pair DDR1_CLK1: +DDR1_CLK1_P -DDR1_CLK1_N
differential pair DDR0_DQS3: +DDR0_DQS3_P -DDR0_DQS3_N
differential pair DDR0_DQS2: +DDR0_DQS2_P -DDR0_DQS2_N
differential pair DDR0_DQS1: +DDR0_DQS1_P -DDR0_DQS1_N
differential pair DDR0_DQS0: +DDR0_DQS0_P -DDR0_DQS0_N
differential pair DDR0_CLK: +DDR0_CLK_P -DDR0_CLK_N
differential pair DDR0_CLK1: +DDR0_CLK1_P -DDR0_CLK1_N
differential pair DDR1_DQS3: +DDR1_DQS3_P -DDR1_DQS3_N
differential pair DDR1_DQS2: +DDR1_DQS2_P -DDR1_DQS2_N
differential pair DDR1_DQS1: +DDR1_DQS1_P -DDR1_DQS1_N
differential pair DDR1_DQS0: +DDR1_DQS0_P -DDR1_DQS0_N

## Components (designator, comment, footprint, x,y, rotation, side; value= is the part's Value field where it differs from the comment)
B1 "SMD_IC_SY6280AAC" SOT95P285X140-5N 19.269,36.093 r270 bottom
C1 "22uF" CAP_0402 32.461,41.681 r270 top
C2 "10uF" CAP_0402 23.673,40.97 r90 top
C3 "1uF" CAP_0201 32.461,43.078 r270 top
C4 "22uF" CAP_0402 25.254,33.898 r90 top
C5 "100nF" CAP_0201 29.283,43.061 r270 top
C6 "100nF" CAP_0201 30.074,47.6 r270 top
C7 "100nF" CAP_0201 30.886,39.243 r90 top
C8 "100nF" CAP_0201 30.886,41.783 r270 top
C9 "100nF" CAP_0201 32.487,39.216 r90 top
C10 "100nF" CAP_0201 32.475,37.898 r90 top
C11 "10uF" CAP_0402 25.297,47.076 r270 top
C12 "1uF" CAP_0201 32.467,35.229 r90 top
C13 "100nF" CAP_0201 30.886,43.713 r90 top
C14 "100nF" CAP_0201 32.487,45.695 r270 top
C15 "100nF" CAP_0201 30.886,46.965 r270 top
C16 "100nF" CAP_0201 25.273,43.739 r90 top
C17 "100nF" CAP_0201 29.286,45.62 r270 top
C18 "100nF" CAP_0201 29.261,35.307 r90 top
C19 "22uF" CAP_0402 26.899,44.323 r270 top
C20 "10uF" CAP_0402 25.298,41.707 r270 top
C21 "1uF" CAP_0201 23.673,42.367 r90 top
C22 "100nF" CAP_0201 29.279,37.898 r90 top
C23 "100nF" CAP_0201 25.248,39.167 r90 top
C24 "100nF" CAP_0201 26.873,37.921 r90 top
C25 "100nF" CAP_0201 23.698,39.216 r90 top
C26 "100nF" CAP_0201 29.271,36.594 r90 top
C27 "100nF" CAP_0201 26.873,36.576 r90 top
C28 "22uF" CAP_0402 30.848,33.924 r90 top
C29 "10uF" CAP_0402 26.848,47.026 r270 top
C30 "1uF" CAP_0201 23.66,35.898 r270 top
C31 "100nF" CAP_0201 23.652,45.644 r270 top
C32 "100nF" CAP_0201 29.286,46.965 r270 top
C33 "100nF" CAP_0201 26.873,45.689 r270 top
C34 "100nF" CAP_0201 30.873,37.246 r270 top
C35 "100nF" CAP_0201 26.873,35.255 r90 top
C36 "100nF" CAP_0201 25.254,37.229 r270 top
C37 "22uF" CAP_0402 33.142,44.414 r270 top
C38 "10uF" CAP_0402 23.652,37.254 r270 top
C39 "1uF" CAP_0201 23.673,44.348 r270 top
C40 "100nF" CAP_0201 23.012,44.282 r270 top
C41 "100nF" CAP_0201 33.925,45.06 r270 top
C42 "100nF" CAP_0201 32.475,36.551 r90 top
C43 "100nF" CAP_0201 33.132,37.651 r270 top
C44 "100nF" CAP_0201 22.949,37.229 r270 top
C45 "100nF" CAP_0201 33.148,36.416 r90 top
C46 "22uF" CAP_0402 51.029,41.529 r270 top
C47 "10uF" CAP_0402 43.84,41.504 r270 top
C48 "1uF" CAP_0201 45.441,44.323 r270 top
C49 "100nF" CAP_0201 42.215,42.977 r270 top
C50 "100nF" CAP_0201 47.828,42.977 r270 top
C51 "100nF" CAP_0201 49.428,41.681 r270 top
C52 "100nF" CAP_0201 51.025,42.938 r270 top
C53 "100nF" CAP_0201 45.441,42.977 r270 top
C54 "100nF" CAP_0201 51.029,39.089 r90 top
C55 "22uF" CAP_0402 49.454,46.965 r270 top
C56 "10uF" CAP_0402 43.84,46.965 r270 top
C57 "1uF" CAP_0201 47.848,33.881 r90 top
C58 "100nF" CAP_0201 51.029,45.618 r270 top
C59 "100nF" CAP_0201 47.828,44.958 r90 top
C60 "100nF" CAP_0201 43.84,43.663 r90 top
C61 "100nF" CAP_0201 42.189,45.618 r270 top
C62 "100nF" CAP_0201 49.424,37.152 r270 top
C63 "100nF" CAP_0201 49.454,43.663 r90 top
C64 "22uF" CAP_0402 43.848,39.203 r90 top
C65 "10uF" CAP_0402 49.428,39.175 r90 top
C66 "1uF" CAP_0201 47.822,37.822 r90 top
C67 "100nF" CAP_0201 45.424,37.779 r90 top
C68 "100nF" CAP_0201 42.23,39.115 r90 top
C69 "100nF" CAP_0201 45.432,36.475 r90 top
C70 "100nF" CAP_0201 42.218,41.68 r270 top
C71 "100nF" CAP_0201 47.828,36.486 r90 top
C72 "100nF" CAP_0201 42.221,37.797 r90 top
C73 "22uF" CAP_0402 49.424,33.771 r90 top
C74 "10uF" CAP_0402 45.398,33.746 r90 top
C75 "1uF" CAP_0201 45.441,45.618 r270 top
C76 "100nF" CAP_0201 47.848,35.148 r90 top
C77 "100nF" CAP_0201 51.025,35.221 r90 top
C78 "100nF" CAP_0201 43.822,37.127 r270 top
C79 "100nF" CAP_0201 45.381,35.136 r90 top
C80 "100nF" CAP_0201 43.84,33.915 r90 top
C81 "100nF" CAP_0201 42.229,35.136 r90 top
C82 "22uF" CAP_0402 51.801,45.329 r270 top
C83 "10uF" CAP_0402 41.218,44.221 r270 top
C84 "1uF" CAP_0201 51.613,36.517 r90 top
C85 "100nF" CAP_0201 51.025,36.5 r90 top
C86 "100nF" CAP_0201 41.504,37.048 r270 top
C87 "100nF" CAP_0201 40.868,37.049 r270 top
C88 "100nF" CAP_0201 42.225,36.475 r90 top
C89 "100nF" CAP_0201 51.025,44.271 r270 top
C90 "100nF" CAP_0201 42.203,44.295 r270 top
C91 "10uF" CAP-T_1206 9.169,26.772 r90 bottom
C92 "4.7uF" CAP_0201 11.811,24.638 r90 bottom
C93 "4.7uF" CAP_0402 7.671,24.765 r270 bottom
C94 "100nF" CAP_0402 6.045,24.765 r270 bottom
C95 "10nF" CAP_0402 6.858,24.765 r270 bottom
C96 "10uF" CAP-T_1206 6.121,34.569 r90 bottom
C97 "1nF" CAP_0402 12.878,18.796 r270 bottom
C98 "10nF" CAP_0402 12.903,17.196 r90 bottom
C99 "100nF" CAP_0201 53.312,16.619 r0 top
C100 "10uF" CAP_0603 66.218,16.561 r90 top
C101 "100nF" CAP_0201 66.142,18.466 r270 top
C102 "100nF" CAP_0201 53.162,17.526 r270 top
C103 "22uF" CAP_0603 39.345,26.314 r225 bottom
C104 "10uF" CAP_0603 40.292,25.502 r225 bottom
C105 "10uF" CAP_0603 52.756,15.672 r0 top
C106 "100nF" CAP_0201 57.633,7.823 r90 top
C107 "100nF" CAP_0201 57.023,7.823 r90 top
C108 "1uF" CAP_0201 39.243,23.927 r225 bottom
C109 "1uF" CAP_0201 38.786,24.377 r225 bottom
C110 "100nF" CAP_0201 53.163,18.692 r90 top
C111 "1uF" CAP_0201 37.831,25.297 r45 bottom
C112 "1uF" CAP_0201 37.411,25.738 r45 bottom
C113 "100nF" CAP_0201 38.269,24.81 r225 bottom
C114 "1nF" CAP_0201 38.313,26.645 r225 bottom
C116 "10uF" CAP_0603 40.869,22.244 r315 bottom
C117 "1uF" CAP_0201 18.694,16.789 r90 bottom
C118 "1uF" CAP_0201 41.021,19.765 r315 bottom
C119 "1uF" CAP_0201 14.351,17.272 r90 bottom
C120 "100nF" CAP_0201 11.6,13.876 r135 bottom
C121 "100nF" CAP_0201 8.546,11.778 r315 bottom
C122 "1uF" CAP_0201 41.97,19.763 r135 bottom
C123 "1uF" CAP_0201 41.028,20.705 r135 bottom
C124 "1uF" CAP_0201 40.139,21.615 r315 bottom
C125 "100nF" CAP_0201 40.112,20.66 r315 bottom
C126 "1nF" CAP_0201 41.95,20.7 r315 bottom
C127 "22uF" CAP_0603 36.317,24.994 r315 bottom
C128 "22uF" CAP_0603 34.898,22.835 r45 bottom
C129 "22uF" CAP_0603 36.279,21.492 r45 bottom
C130 "1uF" CAP_0201 36,23.901 r135 bottom
C131 "1uF" CAP_0201 35.984,22.528 r45 bottom
C132 "1uF" CAP_0201 37.82,21.615 r225 bottom
C133 "1uF" CAP_0201 37.376,23.448 r135 bottom
C134 "1uF" CAP_0201 34.117,23.353 r45 bottom
C135 "100nF" CAP_0201 36.909,20.704 r45 bottom
C136 "1nF" CAP_0201 36.933,23 r135 bottom
C137 "1nF" CAP_0201 37.807,23.898 r135 bottom
C138 "22uF" CAP_0603 38.557,19.123 r45 bottom
C139 "10uF" CAP_0603 38.087,20.53 r45 bottom
C140 "1uF" CAP_0201 40.131,19.332 r225 bottom
C141 "1uF" CAP_0201 39.219,21.594 r135 bottom
C142 "1uF" CAP_0201 40.589,18.873 r225 bottom
C143 "1uF" CAP_0201 40.587,23.885 r315 bottom
C144 "100nF" CAP_0201 39.635,20.195 r315 bottom
C145 "1nF" CAP_0201 41.053,24.359 r315 bottom
C146 "22uF" CAP_0603 42.087,23.6 r225 bottom
C154 "100nF" CAP_0201 43.787,21.133 r45 bottom
C155 "1nF" CAP_0201 42.381,22.504 r225 bottom
C156 "1nF" CAP_0201 42.418,21.158 r315 bottom
C157 "1nF" CAP_0201 42.901,21.617 r135 bottom
C158 "1nF" CAP_0201 43.358,22.074 r135 bottom
C159 "1nF" CAP_0201 43.813,22.53 r135 bottom
C160 "22uF" CAP_0402 35.03,24.393 r45 bottom
C161 "10uF" CAP_0402 34.328,25.316 r315 bottom
C162 "1uF" CAP_0402 33.76,24.731 r315 bottom
C163 "100nF" CAP_0402 34.619,26.152 r315 bottom
C164 "100nF" CAP_0402 36.533,26.205 r135 bottom
C165 "100nF" CAP_0402 37.533,26.838 r225 bottom
C166 "100nF" CAP_0402 36.61,27.533 r315 bottom
C167 "100nF" CAP_0402 39.319,28.27 r315 bottom
C168 "100nF" CAP_0402 38.729,27.644 r315 bottom
C169 "22uF" CAP_0402 38.195,29.337 r315 bottom
C170 "10uF" CAP_0402 37.617,28.771 r315 bottom
C171 "1uF" CAP_0402 35.585,27.419 r315 bottom
C172 "100nF" CAP_0402 41.25,27.355 r225 bottom
C173 "100nF" CAP_0402 41.873,26.822 r225 bottom
C174 "100nF" CAP_0402 41.628,25.381 r45 bottom
C175 "100nF" CAP_0402 42.746,26.517 r225 bottom
C176 "100nF" CAP_0402 42.822,25.441 r225 bottom
C177 "100nF" CAP_0402 43.559,24.994 r225 bottom
C178 "100nF" CAP_0201 44.729,16.078 r315 bottom
C179 "12pF" CAP_0201 45.339,11.328 r135 top
C180 "12pF" CAP_0201 48.415,14.278 r135 top
C181 "100nF" CAP_0201 42.443,18.44 r135 bottom
C182 "100nF" CAP_0201 42.875,18.872 r135 bottom
C183 "100nF" CAP_0201 39.243,22.428 r315 bottom
C184 "100nF" CAP_0201 36.043,19.304 r315 bottom
C185 "1uF" CAP_0201 24.562,18.709 r135 top
C186 "1uF" CAP_0201 21.597,20.082 r135 top
C187 "100nF" CAP_0201 44.247,20.676 r45 bottom
C188 "100nF" CAP_0201 45.161,21.184 r135 bottom
C189 "100nF" CAP_0201 42.901,17.374 r225 bottom
C190 "100nF" CAP_0201 41.478,18.923 r45 bottom
C191 "1nF" CAP_0201 37.389,11.938 r45 bottom
C192 "1uF" CAP_0201 46.05,20.295 r135 bottom
C193 "1uF" CAP_0201 44.755,22.073 r225 bottom
C194 "100nF" CAP_0201 39.243,15.189 r135 bottom
C195 "100nF" CAP_0201 52.121,24.536 r45 top
C196 "100nF" CAP_0201 52.527,24.13 r45 top
C197 "100nF" CAP_0201 52.934,23.724 r45 top
C198 "100nF" CAP_0201 53.368,23.289 r45 top
C199 "100nF" CAP_0201 52.857,20.879 r315 top
C200 "100nF" CAP_0201 52.451,20.472 r315 top
C201 "100nF" CAP_0201 51.994,20.015 r315 top
C202 "100nF" CAP_0201 51.587,19.609 r315 top
C203 "100nF" CAP_0201 34.62,20.692 r315 bottom
C204 "100nF" CAP_0201 43.332,23.444 r45 bottom
C205 "1uF" CAP_0201 44.298,23.012 r315 bottom
C206 "100nF" CAP_0201 39.192,18.364 r225 bottom
C207 "1uF" CAP_0201 39.649,17.907 r225 bottom
C208 "100nF" CAP_0201 32.269,22.998 r135 bottom
C209 "100nF" CAP_0201 44.679,23.495 r135 bottom
C210 "100nF" CAP_0201 41.066,17.901 r315 bottom
C211 "100nF" CAP_0201 35.077,18.39 r135 bottom
C212 "100nF" CAP_0201 37.783,16.99 r45 bottom
C213 "100nF" CAP_0201 40.607,17.457 r315 bottom
C214 "100nF" CAP_0201 33.718,21.612 r315 bottom
C215 "100nF" CAP_0201 40.624,16.065 r45 bottom
C216 "100nF" CAP_0201 45.683,23.852 r225 bottom
C217 "100nF" CAP_0201 32.766,22.077 r225 bottom
C218 "100nF" CAP_0201 36.958,18.391 r135 bottom
C219 "100nF" CAP_0201 45.618,22.047 r225 bottom
C220 "100nF" CAP_0201 38.71,17.45 r135 bottom
C221 "100nF" CAP_0201 34.604,17.925 r135 bottom
C222 "100nF" CAP_0201 56.439,7.823 r90 top
C223 "100nF" CAP_0201 31.344,22.987 r315 bottom
C224 "100nF" CAP_0201 31.849,22.065 r45 bottom
C225 "100nF" CAP_0201 31.369,23.901 r315 bottom
C226 "100nF" CAP_0201 36.5,17.932 r135 bottom
C227 "100nF" CAP_0201 50.662,20.224 r315 bottom
C228 "100nF" CAP_0201 32.741,23.47 r135 bottom
C229 "100nF" CAP_0201 42.89,19.751 r135 bottom
C230 "100nF" CAP_0201 43.358,20.218 r135 bottom
C231 "100nF" CAP_0402 12.818,39.294 r90 top
C232 "1uF" CAP_0402 13.141,45.836 r315 bottom
C233 "1uF" CAP_0402 16.71,45.166 r315 bottom
C234 "1uF" CAP_0402 12.613,47.849 r45 bottom
C235 "220pF" CAP_0402 17.577,46.05 r135 bottom
C236 "220pF" CAP_0402 16.123,44.587 r135 bottom
C237 "100nF" CAP_0201 16.3,40.294 r90 top
C238 "100nF" CAP_0201 17.018,40.294 r90 top
C239 "100nF" CAP_0201 12.993,44.138 r270 bottom
C240 "100nF" CAP_0201 12.319,44.145 r270 bottom
C241 "10nF" CAP_0402 20.218,38.862 r270 bottom
C242 "100nF" CAP_0201 14.242,40.294 r90 top
C243 "10uF" CAP_0402 18.339,33.122 r90 bottom
C244 "100nF" CAP_0201 15.906,42.559 r90 bottom
C245 "1uF" CAP_0201 58.979,8.357 r90 top
C246 "100nF" CAP_0201 55.88,8.357 r90 top
C247 "100nF" CAP_0201 52.197,9.881 r0 bottom
C248 "100nF" CAP_0201 55.88,17.17 r270 bottom
C249 "100nF" CAP_0201 60.249,17.221 r270 bottom
C250 "100nF" CAP_0201 61.976,15.265 r180 bottom
C251 "100nF" CAP_0201 61.976,13.437 r180 bottom
C252 "1uF" CAP_0402 54.229,18.593 r270 bottom
C253 "1uF" CAP_0402 55.042,18.593 r270 bottom
C254 "100nF" CAP_0201 59.03,18.542 r270 bottom
C255 "4.7nF" CAP_0201 56.54,17.17 r270 bottom
C256 "1uF" CAP_0201 52.197,13.843 r0 bottom
C257 "100nF" CAP_0201 61.99,14.009 r180 bottom
C258 "100nF" CAP_0201 62.001,16.535 r180 bottom
C259 "100nF" CAP_0201 62.001,11.739 r180 bottom
C260 "100nF" CAP_0201 62.001,11.176 r180 bottom
C261 "10uF" CAP_0402 62.149,9.926 r180 bottom
C262 "100nF" CAP_0201 61.997,10.612 r180 bottom
C263 "12pF" CAP_0402 65.242,16.79 r0 bottom
C264 "12pF" CAP_0402 64.048,11.867 r180 bottom
C265 "10uF" CAP_0402 9.779,31.826 r270 top
C266 "100nF" CAP_0402 8.966,31.826 r270 top
C267 "10uF" CAP_0402 14.783,27.534 r90 top
C268 "10uF" CAP_0402 15.596,27.534 r90 top
C269 "220nF" CAP_0402 5.842,35.611 r225 top
C270 "22uF" CAP_0402 8.128,41.961 r135 top
C271 "22uF" CAP_0402 7.544,41.377 r135 top
C272 "100nF" CAP_0402 6.96,40.792 r135 top
C273 "100nF" CAP_0402 11.024,38.024 r135 top
C274 "10uF" CAP_0402 10.465,39.675 r315 top
C275 "10uF" CAP_0402 11.582,38.608 r135 top
C276 "4.7uF" CAP_0402 17.348,35.789 r90 top
C277 "22uF" CAP_0402 54,41.732 r90 top
C278 "22uF" CAP_0402 54.813,41.732 r90 top
C279 "100nF" CAP_0201 55.575,41.894 r90 top
C280 "1uF" CAP_0402 7.518,33.934 r45 top
C281 "1uF" CAP_0402 37.567,45.415 r270 top
C282 "100nF" CAP_0402 36.754,45.415 r270 top
C283 "100nF" CAP_0402 36.119,43.409 r90 top
C284 "1uF" CAP_0402 37.922,40.843 r0 top
C285 "22uF" CAP_0402 22.963,5.396 r90 bottom
C286 "100nF" CAP_0402 23.763,7.114 r180 bottom
C287 "100nF" CAP_0402 22.049,5.396 r90 bottom
C288 "22uF" CAP_0402 31.75,5.486 r90 bottom
C289 "100nF" CAP_0402 32.614,5.486 r90 bottom
C290 "100nF" CAP_0402 33.503,7.264 r180 bottom
C291 "100nF" CAP_0402 22.626,9.91 r270 bottom
C292 "22uF" CAP_0402 19.458,9.942 r270 bottom
C293 "22uF" CAP_0402 18.612,9.936 r270 bottom
C294 "22uF" CAP_0402 20.362,9.92 r270 bottom
C295 "22uF" CAP_0402 29.82,9.957 r270 bottom
C296 "22uF" CAP_0402 28.981,9.931 r270 bottom
C297 "22uF" CAP_0402 28.143,9.931 r270 bottom
C298 "22uF" CAP_0402 27.305,9.931 r270 bottom
C299 "100nF" CAP_0402 29.337,11.151 r0 bottom
C300 "10uF" CAP_0402 19.731,25.037 r45 bottom
C301 "100nF" CAP_0402 19.156,25.631 r45 bottom
C302 "10uF" CAP_0402 25.194,25.163 r315 top
C303 "100nF" CAP_0402 21.424,25.941 r135 bottom
C304 "22uF" CAP_0402 14.976,26.756 r225 bottom
C305 "10uF" CAP_0402 24.776,29.884 r45 top
C306 "22nF" CAP_0402 21.356,31.132 r225 bottom
C307 "100nF" CAP_0402 58.852,37.109 r270 top
C308 "100nF" CAP_0402 59.715,37.109 r270 top
C309 "22uF" CAP_0603 64.364,28.626 r180 top
C310 "22uF" CAP_0603 64.364,33.401 r180 top
C311 "22uF" CAP_0603 54.28,27.635 r0 top
C312 "22uF" CAP_0603 58.699,26.949 r90 bottom
C313 "2.2uF" CAP_0402 60.858,27.356 r90 top
C314 "2.2uF" CAP_0402 61.671,27.356 r90 top
C315 "2.2uF" CAP_0402 54.212,34.394 r0 bottom
C316 "2.2uF" CAP_0402 53.535,33.996 r0 top
C317 "22uF" CAP_0603 49.327,31.902 r180 bottom
C318 "22uF" CAP_0603 55.321,38.659 r90 top
C319 "22uF" CAP_0603 65.481,26.467 r0 bottom
C320 "22uF" CAP_0603 65.481,27.686 r0 bottom
C321 "47pF" CAP_0402 60.579,36.982 r90 bottom
C322 "22uF" CAP_0603 62.408,25.527 r90 top
C323 "22uF" CAP_0603 61.189,25.527 r90 top
C324 "2.2uF" CAP_0402 54.212,31.143 r0 bottom
C325 "2.2uF" CAP_0402 54.212,30.33 r0 bottom
C326 "2.2uF" CAP_0402 54.227,35.022 r0 top
C327 "2.2uF" CAP_0402 53.535,29.805 r0 top
C328 "100nF" CAP_0402 63.983,30.48 r0 top
C329 "1uF" CAP_0402 54.204,35.839 r0 top
C330 "1uF" CAP_0402 54.212,32.768 r0 bottom
C331 "1uF" CAP_0402 54.212,31.955 r0 bottom
C332 "1uF" CAP_0402 54.212,29.504 r0 bottom
C333 "1uF" CAP_0402 53.525,30.632 r0 top
C334 "1uF" CAP_0402 54.668,28.651 r0 top
C335 "1uF" CAP_0402 57.683,27.356 r90 bottom
C336 "1uF" CAP_0402 63.983,29.642 r180 top
C337 "2.2uF" CAP_0402 53.535,33.183 r0 top
C338 "2.2uF" CAP_0402 53.535,31.456 r0 top
C339 "1uF" CAP_0402 63.983,32.385 r180 top
C340 "1uF" CAP_0402 53.535,32.281 r0 top
C341 "22pF" CAP_0402 59.106,38.837 r90 bottom
C342 "100nF" CAP_0402 63.957,37.338 r270 top
C343 "22pF" CAP_0402 55.677,38.862 r90 bottom
C344 "100nF" CAP_0402 63.957,34.442 r180 top
C345 "100nF" CAP_0402 63.957,35.255 r180 top
C346 "100nF" CAP_0402 54.212,33.581 r0 bottom
C347 "10uF" CAP_0402 61.417,40.767 r90 bottom
D1 "BZT52C3V3T-7" DIO_SOD523 22.606,23.567 r225 top
D2 "BZT52C3V3T-7" DIO_SOD523 39.133,7.02 r225 top
D3 "BZT52C3V3T-7" DIO_SOD523 40.946,8.952 r225 bottom
D4 "BZT52C3V3T-7" DIO_SOD523 14.58,38.837 r180 top
D5 "BAT54CWT1G" DIO_SOT-323-3 62.306,37.948 r90 top
D6 "1N4148WT" DIO_SOD523 65.837,37.821 r90 top
D7 "AVRL101A1R1NTB" DIO_0402_SMD 66.954,38.659 r90 top
DS1 "RED LED" LED_0805 6.985,29.032 r270 top
FB1 "BLM15PD121SN1D" RES_0402 33.934,43.561 r90 top
FB2 "BLM15PD121SN1D" RES_0402 41.224,42.621 r90 top
FB3 "BLM15PD121SN1D" RES_0402 33.488,27.305 r135 bottom
FB4 "BLM15PD121SN1D" RES_0402 37.157,28.115 r315 bottom
FB5 "BLM15PD121SN1D" RES_0402 44.284,24.508 r225 bottom
FB6 "BLM15PD121SN1D" RES_0402 40.53,27.832 r225 bottom
FB7 "BLM15PD121SN1D" RES_0402 41.961,17.983 r135 bottom
FB8 "BLM15PD121SN1D" RES_0402 39.7,23.343 r225 bottom
FB9 "BLM15PD121SN1D" RES_0402 36.906,19.456 r135 bottom
FB10 "BLM15PD121SN1D" RES_0402 40.056,16.51 r225 bottom
J1 "ECT818000071" CON3_UFL_116_SMD_ST 2.421,14.897 r90 top
J2 "ECT818000071" CON3_UFL_116_SMD_ST 2.421,10.203 r90 top
J3 "U262-241N-4BV64" CON24_19.64_U262-241N-4BV64_TH_RA 14.575,44.225 r180 top
J4 "UJC-HP-3-SMT-TR" CON6_48.4_UJC-HP-3-SMT-TR 57.201,45.25 r180 top
J5 "DIMM 260" DIMM260_DDR4 34.79,1.397 r0 top
L1 "WPN201610H4R7MT" IND_62.9_110X86.6_SMD 64.008,9.931 r90 bottom
L2 "DFE252010P-1R0M=P2" IND_1008 12.294,27.94 r0 top
L3 "WPN4020H1R5MT" IND_1616 4.445,38.913 r45 top
L4 "DFE252010P-1R0M=P2" IND_1008 19.176,6.979 r90 bottom
L5 "DFE252010P-R47M=P2" IND_1008 28.931,7.061 r90 bottom
L6 "DFE252010P-1R0M=P2" IND_1008 16.717,25.945 r225 bottom
L7 "CB2012T1R0M" IND_0805 28.361,29.473 r45 top
L8 "DFE252010P-1R0M=P2" IND_1008 57.836,39.319 r180 top
L9 "DFE252010P-1R0M=P2" IND_1008 65.43,30.201 r90 bottom
L10 "DFE252010P-1R0M=P2" IND_1008 63.348,37.694 r180 bottom
L11 "DFE252010P-1R0M=P2" IND_1008 58.623,26.162 r180 top
Q1 "WNM2021-3/TR" SOT-323-3 4.928,28.974 r90 top
Q2 "SI7615CDN-T1-GE3" PowerPAK_1212-8_SMD 15.243,35.591 r180 top
Q3 "BSS84W-7-F" SOT-323-3 66.091,23.825 r0 bottom
Q4 "MMBT3904WT1G" SOT-323-3 61.824,23.952 r0 bottom
Q5 "WNM2016-3/TR" "SOT 23-3" 63.856,40.767 r180 bottom
Q6 "WNM2021-3/TR" SOT-323-3 64.16,34.468 r270 bottom
R1 "10K" RES_0201 22.936,35.89 r270 top
R2 "10K" RES_0201 24.105,43.383 r0 top
R3 "240" RES_0201 26.873,33.909 r90 top
R4 "240" RES_0201 29.235,33.985 r90 top
R5 "10k" RES_0201 50.19,43.002 r270 top
R6 "10k" RES_0201 50.597,37.49 r180 top
R7 "240" RES_0201 47.828,46.888 r90 top
R8 "240" RES_0201 45.415,46.939 r90 top
R9 "10K" RES_0201 58.282,7.787 r90 top
R10 "10K" RES_0201 10.82,24.638 r270 bottom
R11 "40.2K" RES_0201 6.883,30.81 r270 bottom
R12 "10K" RES_0201 6.121,30.81 r90 bottom
R13 "1K" RES_0402 5.385,30.861 r90 bottom
R14 "1K" RES_0201 12.065,18.745 r270 bottom
R15 "10K" RES_0201 8.088,11.343 r135 bottom
R16 "47K" RES_0402 19.431,16.942 r90 bottom
R17 "120K" RES_0402 16.916,15.24 r0 bottom
R18 "10K" RES_0201 42.795,15.64 r225 bottom
R19 "240R" RES_0201 34.656,27.123 r315 bottom
R20 "240R" RES_0201 42.899,27.698 r225 bottom
R21 "1M" RES_0201 44.475,12.217 r315 top
R22 "33R" RES_0201 45.644,15.164 r135 bottom
R23 "1K" RES_0201 47.523,15.138 r135 top
R24 "33R" RES_0201 43.307,15.138 r225 bottom
R25 "22R" RES_0201 46.457,19.253 r45 bottom
R26 "10K" RES_0201 47.015,18.796 r225 bottom
R27 "100R" RES_0201 36.906,12.446 r225 bottom
R28 "1.62K" RES_0201 33.731,17.932 r315 bottom
R29 "6.04K" RES_0201 45.212,24.308 r45 bottom
R30 "10K" RES_0201 33.691,18.914 r315 bottom
R31 "4.02K" RES_0201 32.314,19.767 r45 bottom
R32 "499R" RES_0201 34.595,16.535 r45 bottom
R33 "499R" RES_0201 36.881,16.078 r45 bottom
R34 "499R" RES_0201 35.966,14.707 r315 bottom
R35 "499R" RES_0201 35.509,15.672 r45 bottom
R36 "1K" RES_0201 38.338,9.211 r225 bottom
R37 "133R" RES_0201 42.855,11.221 r315 bottom
R38 "1K" RES_0201 41.45,7.723 r315 bottom
R39 "133R" RES_0201 41.484,12.898 r135 bottom
R40 "4.02K" RES_0201 32.791,18.821 r135 bottom
R41 "4.02K" RES_0201 31.775,20.295 r45 bottom
R42 "2.2K" RES_0201 49.759,19.329 r315 bottom
R43 "2.2K" RES_0201 46.507,21.59 r315 bottom
R44 "2.2K" RES_0201 48.819,20.269 r135 bottom
R45 "2.2K" RES_0201 47.93,20.752 r45 bottom
R46 "22R" RES_0201 46.991,23.413 r45 bottom
R47 "1K" RES_0201 30.048,22.53 r315 bottom
R48 "1K" RES_0201 26.365,21.59 r135 bottom
R49 "22R" RES_0201 45.644,22.962 r225 bottom
R50 "22R" RES_0201 48.445,23.441 r135 bottom
R51 "22R" RES_0201 52.214,15.301 r180 bottom
R52 "1K" RES_0402 28.804,22.31 r0 bottom
R53 "1K" RES_0402 27.661,21.209 r135 bottom
R54 "22R" RES_0201 46.654,22.586 r315 bottom
R55 "22R" RES_0201 53.88,17.17 r90 bottom
R56 "22R" RES_0201 51.115,19.162 r315 top
R57 "2.2K" RES_0201 46.152,17.501 r135 bottom
R58 "2.2K" RES_0201 44.704,19.329 r225 bottom
R59 "2.2K" RES_0201 45.618,16.967 r135 bottom
R60 "2.2K" RES_0201 46.533,16.053 r315 bottom
R61 "2.2K" RES_0201 25.07,24.181 r135 bottom
R62 "2.2K" RES_0201 32.309,25.273 r45 bottom
R63 "1K" RES_0402 15.638,40.132 r90 top
R64 "3.4K" RES_0402 18.313,38.862 r90 bottom
R65 "2M" RES_0201 13.568,40.259 r90 top
R66 "2M" RES_0201 17.323,42.524 r90 bottom
R67 "100K" RES_0201 16.586,42.524 r90 bottom
R68 "100K" RES_0201 14.92,40.259 r90 top
R69 "0R" RES_0201 55.758,18.455 r90 bottom
R70 "0R" RES_0201 62.027,15.9 r180 bottom
R71 "4.7K" RES_0201 57.582,17.247 r90 bottom
R72 "4.7K" RES_0201 52.172,13.233 r180 bottom
R73 "4.7K" RES_0201 56.642,18.466 r90 bottom
R74 "33R" RES_0201 62.027,9.119 r180 bottom
R75 "2.49K" RES_0201 62.001,14.63 r180 bottom
R76 "33R" RES_0201 52.172,12.573 r0 bottom
R77 "0R" RES_0201 55.245,17.196 r270 bottom
R78 "0R" RES_0201 54.559,17.17 r270 bottom
R79 "33R" RES_0201 52.172,14.453 r0 bottom
R80 "4.7K" RES_0201 59.77,18.587 r90 bottom
R81 "4.7K" RES_0201 52.172,10.592 r0 bottom
R82 "4.7K" RES_0201 50.902,10.566 r180 bottom
R83 "4.7K" RES_0201 60.554,18.593 r270 bottom
R84 "4.7K" RES_0201 59.03,17.247 r90 bottom
R85 "4.7K" RES_0201 58.344,17.247 r270 bottom
R86 "4.7K" RES_0201 58.344,18.517 r90 bottom
R87 "4.7K" RES_0201 52.172,8.611 r0 bottom
R88 "4.7K" RES_0201 52.172,9.271 r180 bottom
R89 "4.7K" RES_0201 52.172,11.252 r180 bottom
R90 "1.1K" RES_0201 62.045,12.358 r180 bottom
R91 "4.7K" RES_0201 52.172,11.913 r180 bottom
R92 "4.7K" RES_0201 8.306,28.423 r90 top
R93 "1K" RES_0201 3.506,27.745 r90 top
R94 "30K" RES_0402 14.732,30.683 r270 top
R95 "6.8K" RES_0402 15.57,30.683 r90 top
R96 "3.3R" RES_0402 6.401,35.052 r225 top
R97 "100K" RES_0402 18.136,35.789 r90 top
R98 "100K" RES_0402 9.906,39.116 r315 top
R99 "200K" RES_0402 18.923,35.789 r90 top
R100 "10K" RES_0402 10.643,34.874 r135 top
R101 "5.6K" RES_0201 57.531,41.935 r90 top
R102 "5.6K" RES_0201 56.464,41.935 r90 top
R103 "10K" RES_0402 10.084,34.315 r135 top
R104 "100K" RES_0402 6.96,34.519 r225 top
R105 "10K" RES_0402 23.432,9.909 r90 bottom
R106 "10K" RES_0402 29.337,11.938 r180 bottom
R107 "100R" RES_0402 21.51,9.502 r180 bottom
R108 "100R" RES_0402 31.013,9.55 r180 bottom
R109 "10K" RES_0402 21.985,26.497 r135 bottom
R110 "100K" RES_0402 20.264,29.976 r45 bottom
R111 "100K" RES_0402 63.957,23.825 r270 bottom
R112 "100K" RES_0402 25.74,29.117 r135 top
R113 "10K" RES_0402 58.861,23.982 r270 bottom
R114 "200K" RES_0402 20.808,29.454 r225 bottom
R115 "47K" RES_0402 59.686,23.991 r270 bottom
R116 "200K" RES_0402 25.196,28.586 r315 top
R117 "39K" RES_0402 22.47,30.036 r225 bottom
R118 "118K" RES_0402 21.336,28.895 r225 bottom
R119 "5.6K" RES_0402 23.596,29.49 r135 bottom
R120 "12K" RES_0402 21.916,30.575 r225 bottom
R121 "200K" RES_0402 60.325,38.633 r270 bottom
R122 "51K" RES_0402 61.087,38.481 r270 bottom
R123 "0.1R" RES_0402 56.566,37.109 r90 top
R124 "10K" RES_0402 56.464,27.356 r270 top
R125 "10K" RES_0402 64.745,37.338 r270 top
R126 "10K" RES_0402 57.937,37.211 r270 top
R127 "100R" RES_0402 62.459,27.356 r270 top
R128 "100R" RES_0402 66.904,36.551 r90 top
R129 "300K" RES_0402 63.984,27.356 r270 top
R130 "100K" RES_0402 65.811,33.122 r90 bottom
R131 "300K" RES_0402 63.221,27.356 r90 top
SW1 "4982" SW_177_39.3X77.7_SMD 67.453,26.118 r270 top
SW2 "4982" SW_177_39.3X77.7_SMD 24.578,10.811 r270 top
SW3 "4982" SW_177_39.3X77.7_SMD 67.548,32.513 r90 top
U1 "RS512M32LZ4D2ANP-75BT" FBGA200_SMD#1 28.075,40.475 r0 bottom
U2 "RS512M32LZ4D2ANP-75BT" FBGA200_SMD#2 46.625,40.375 r180 bottom
U3 "KLMAG2WEMB-B031" BGA153C50P14X14_1150X1300X70 59.734,17.719 r0 top
U4 "LD39050PUR" DFN-6_37.4_165_33X15_SMD 9.373,31.471 r180 bottom
U5 "WF60" MOD_WF60 12.559,15.98 r90 top locked
U6 "TXB0108NMER" NFBGA_31.4_125.9X102.36 10.064,12.807 r135 bottom
U7 "RT9193-18GU5" SC70-5 16.408,16.916 r180 bottom
U8 "RK3399" FBGA828_23_826X826 38.52,22.296 r315 top
U9 "RT9193-18GU5" SC70-5 23.439,20.711 r135 top
U10 "FUSB302MPX" MLP-14_98.4X98.4_SMD 14.969,47.102 r45 bottom
U11 "RTL8211E-VB-CG" QFN48_19.6_324X324_SMD 57.094,12.257 r90 bottom
U12 "MP2143DJ-LF-Z" SOT23-8 12.268,31.064 r0 top
U13 "NB680GD-Z" QFN-12_19_118X118_SMD 8.614,36.912 r225 top
U14 "RT9193-33PU5" SC70-5 37.944,42.926 r90 top
U15 "SYR838PKC" CSP20_15.7_100x84_SMD 21.828,7.501 r180 bottom
U16 "SYR838PKC" CSP20_15.7_100x84_SMD 31.572,7.639 r180 bottom
U17 "RT8010GQW" WDFN-6_26_133X100_SMD 19.754,27.591 r135 bottom
U18 "RT8010GQW" WDFN-6_26_133X100_SMD 26.321,26.794 r45 top
U19 "RK808-D" QFN68_13.7_220.4X220.4_SMD 59.102,32.224 r0 top
Y1 "ECS-327MVATX-3-CN-TR" XTAL_57_35X31_SMD 10.668,19.05 r270 bottom
Y2 "24Mhz" XTAL_ABM8AIG-24.000MHZ-12-2Z-T3 46.825,12.824 r315 top
Y3 "24Mhz" XTAL_ABM8AIG-24.000MHZ-12-2Z-T3 64.636,14.312 r270 bottom
Y4 "ECS-.327-6-34RR-TR" XTAL_ECS-.327-6-34RR-TR 57.298,37.211 r0 bottom

## Footprints (in the part's own frame and the unit in brackets; to place one, negate y for a bottom-side part, rotate by r counter-clockwise, add the part's x,y. Pads: shape width x height; smd on the part's side, far side on the other; paste and mask are expansions set on the pad)
BGA153C50P14X14_1150X1300X70 [mm] "BGA, 153-Leads, Body 11.50x13.00mmx0.70mm, Pitch 0.50mm"
  round 0.28 smd: A1(-3.25,3.25) A2(-2.75,3.25) A3(-2.25,3.25) A4(-1.75,3.25) A5(-1.25,3.25) A6(-0.75,3.25) A7(-0.25,3.25) A8(0.25,3.25) A9(0.75,3.25) A10(1.25,3.25) A11(1.75,3.25) A12(2.25,3.25) A13(2.75,3.25) A14(3.25,3.25) B1(-3.25,2.75) B2(-2.75,2.75) B3(-2.25,2.75) B4(-1.75,2.75) B5(-1.25,2.75) B6(-0.75,2.75) B7(-0.25,2.75) B8(0.25,2.75) B9(0.75,2.75) B10(1.25,2.75) B11(1.75,2.75) B12(2.25,2.75) B13(2.75,2.75) B14(3.25,2.75) C1(-3.25,2.25) C2(-2.75,2.25) C3(-2.25,2.25) C4(-1.75,2.25) C5(-1.25,2.25) C6(-0.75,2.25) C7(-0.25,2.25) C8(0.25,2.25) C9(0.75,2.25) C10(1.25,2.25) C11(1.75,2.25) C12(2.25,2.25) C13(2.75,2.25) C14(3.25,2.25) D1(-3.25,1.75) D2(-2.75,1.75) D3(-2.25,1.75) D4(-1.75,1.75) D12(2.25,1.75) D13(2.75,1.75) D14(3.25,1.75) E1(-3.25,1.25) E2(-2.75,1.25) E3(-2.25,1.25) E5(-1.25,1.25) E6(-0.75,1.25) E7(-0.25,1.25) E8(0.25,1.25) E9(0.75,1.25) E10(1.25,1.25) E12(2.25,1.25) E13(2.75,1.25) E14(3.25,1.25) F1(-3.25,0.75) F2(-2.75,0.75) F3(-2.25,0.75) F5(-1.25,0.75) F10(1.25,0.75) F12(2.25,0.75) F13(2.75,0.75) F14(3.25,0.75) G1(-3.25,0.25) G2(-2.75,0.25) G3(-2.25,0.25) G5(-1.25,0.25) G10(1.25,0.25) G12(2.25,0.25) G13(2.75,0.25) G14(3.25,0.25) H1(-3.25,-0.25) H2(-2.75,-0.25) H3(-2.25,-0.25) H5(-1.25,-0.25) H10(1.25,-0.25) H12(2.25,-0.25) H13(2.75,-0.25) H14(3.25,-0.25) J1(-3.25,-0.75) J2(-2.75,-0.75) J3(-2.25,-0.75) J5(-1.25,-0.75) J10(1.25,-0.75) J12(2.25,-0.75) J13(2.75,-0.75) J14(3.25,-0.75) K1(-3.25,-1.25) K2(-2.75,-1.25) K3(-2.25,-1.25) K5(-1.25,-1.25) K6(-0.75,-1.25) K7(-0.25,-1.25) K8(0.25,-1.25) K9(0.75,-1.25) K10(1.25,-1.25) K12(2.25,-1.25) K13(2.75,-1.25) K14(3.25,-1.25) L1(-3.25,-1.75) L2(-2.75,-1.75) L3(-2.25,-1.75) L12(2.25,-1.75) L13(2.75,-1.75) L14(3.25,-1.75) M1(-3.25,-2.25) M2(-2.75,-2.25) M3(-2.25,-2.25) M4(-1.75,-2.25) M5(-1.25,-2.25) M6(-0.75,-2.25) M7(-0.25,-2.25) M8(0.25,-2.25) M9(0.75,-2.25) M10(1.25,-2.25) M11(1.75,-2.25) M12(2.25,-2.25) M13(2.75,-2.25) M14(3.25,-2.25) N1(-3.25,-2.75) N2(-2.75,-2.75) N3(-2.25,-2.75) N4(-1.75,-2.75) N5(-1.25,-2.75) N6(-0.75,-2.75) N7(-0.25,-2.75) N8(0.25,-2.75) N9(0.75,-2.75) N10(1.25,-2.75) N11(1.75,-2.75) N12(2.25,-2.75) N13(2.75,-2.75) N14(3.25,-2.75) P1(-3.25,-3.25) P2(-2.75,-3.25) P3(-2.25,-3.25) P4(-1.75,-3.25) P5(-1.25,-3.25) P6(-0.75,-3.25) P7(-0.25,-3.25) P8(0.25,-3.25) P9(0.75,-3.25) P10(1.25,-3.25) P11(1.75,-3.25) P12(2.25,-3.25) P13(2.75,-3.25) P14(3.25,-3.25)
  silkscreen extent -5.75,-6.5 5.75,6.5, body extent -5.75,-6.5 5.75,6.5, height 0.7
CAP-T_1206 [mil] "Tantalum Capacitor"
  rect 60x60 smd: 1(-67.49,-0.2) 2(67.51,-0.2)
  silkscreen extent -107,-40 108,40, body extent -63,-31 63,32, height 39
CAP_0201 [mm]
  rect 0.3x0.3 smd: 1(-0.3,0) 2(0.3,0)
  silkscreen extent -0.6,-0.3 0.6,0.3, body extent -0.44,-0.15 0.44,0.15, height 0.31
CAP_0402 [mm] "Capacitor"
  rect 0.5x0.5 smd mask+0.051: 1(-0.406,0) 2(0.406,0)
  silkscreen extent -0.76,-0.36 0.76,0.36, body extent -0.53,-0.28 0.52,0.27, height 0.55
CAP_0603 [mm] "Capacitor"
  rect 0.6x0.9 smd mask+0.051: 1(-0.711,0) 2(0.711,0)
  silkscreen extent -1.14,-0.56 1.14,0.56, body extent -0.88,-0.48 0.87,0.47, height 0.87
CON3_UFL_116_SMD_ST [mm] "UFL Connector"
  rect 1.05x2.2 smd: 1(-1.475,0.763) 3(1.475,0.763)
  rect 1x1.05 smd: 2(0,-0.763)
  silkscreen extent -2.25,-1.54 2.25,2.31, body extent -1.5,-0.79 1.5,2.31, height 1.25
CON6_48.4_UJC-HP-3-SMT-TR [mm] "Type-C Connector"
  rect 0.7x1.15 smd: A5(-0.312,1.9) B5(0.688,1.9)
  rect 0.8x1.15 smd: A9(1.708,1.9) B9(-1.332,1.9)
  rect 0.9x1.15 smd: A12(2.938,1.9) B12(-2.562,1.9)
  rrect50% 1x2 hole 1.5 slot 0.5 at 0 deg unplated: E1(-4.132,1.9) E2(4.508,1.9) E3(4.508,-1.9) E4(-4.132,-1.9)
  silkscreen extent -4.28,-4.5 4.66,0.73, body extent -4.27,-4.5 4.67,2.3, height 3.42
CON24_19.64_U262-241N-4BV64_TH_RA [mm] "Type C Connector"
  rect 0.3x1 smd mask+0.076: A1(-2.625,2.625) A2(-2.125,2.625) A3(-1.625,2.625) A4(-1.125,2.625) A5(-0.625,2.625) A6(-0.125,2.625) A7(0.375,2.625) A8(0.875,2.625) A9(1.375,2.625) A10(1.875,2.625) A11(2.375,2.625) A12(2.875,2.625) B1(2.625,1.275) B2(2.125,1.275) B3(1.625,1.275) B4(1.125,1.275) B5(0.625,1.275) B6(0.125,1.275) B7(-0.375,1.275) B8(-0.875,1.275) B9(-1.375,1.275) B10(-1.875,1.275) B11(-2.375,1.275) B12(-2.875,1.275)
  oval 1x2.199 hole 0.6 slot 1.6 at 90 deg: S1(-4.32,1.925) S2(4.32,1.925)
  oval 1.499x1 hole 0.6 slot 1.2 at 0 deg: S1(-4.064,1.445) S2(4.064,1.445)
  oval 1.2x2.4 hole 0.6 slot 1.9 at 90 deg: S3(-4.32,-2.625) S4(4.32,-2.625)
  round 0.5 hole 0.5 unplated: ""(-3.4,0.575) ""(3.4,0.575)
  silkscreen extent -4.5,-5.33 4.5,2.67, body extent -6.06,-7.1 6.29,3.6, height 3.35
CSP20_15.7_100x84_SMD [mm] "CSP Package"
  round 0.25 smd mask+0.076: A1(-0.6,0.8) A2(-0.2,0.8) A3(0.2,0.8) A4(0.6,0.8) B1(-0.6,0.4) B2(-0.2,0.4) B3(0.2,0.4) B4(0.6,0.4) C1(-0.6,0) C2(-0.2,0) C3(0.2,0) C4(0.6,0) D1(-0.6,-0.4) D2(-0.2,-0.4) D3(0.2,-0.4) D4(0.6,-0.4) E1(-0.6,-0.8) E2(-0.2,-0.8) E3(0.2,-0.8) E4(0.6,-0.8)
  silkscreen extent -1.6,-1.3 1.1,1.3, body extent -1.12,-1.32 1.12,1.32, height 0.56
DFN-6_37.4_165_33X15_SMD [mm] "DFN Package"
  rect 0.84x0.4 smd mask+0.076: 1(-1.435,0.95) 2(-1.435,0) 3(-1.435,-0.95) 4(1.435,-0.95) 5(1.435,0) 6(1.435,0.95)
  rect 1.2x2.365 smd mask+0.076: 7(0,0)
  silkscreen extent -2.62,-1.5 2.08,1.5, body extent -1.5,-1.5 1.5,1.5, height 0.85